# EAGLE board SparkFun_Optical_Tracking_Odometry_Sensor-Panel (EAGLE 9.6.2), part 1 of 6
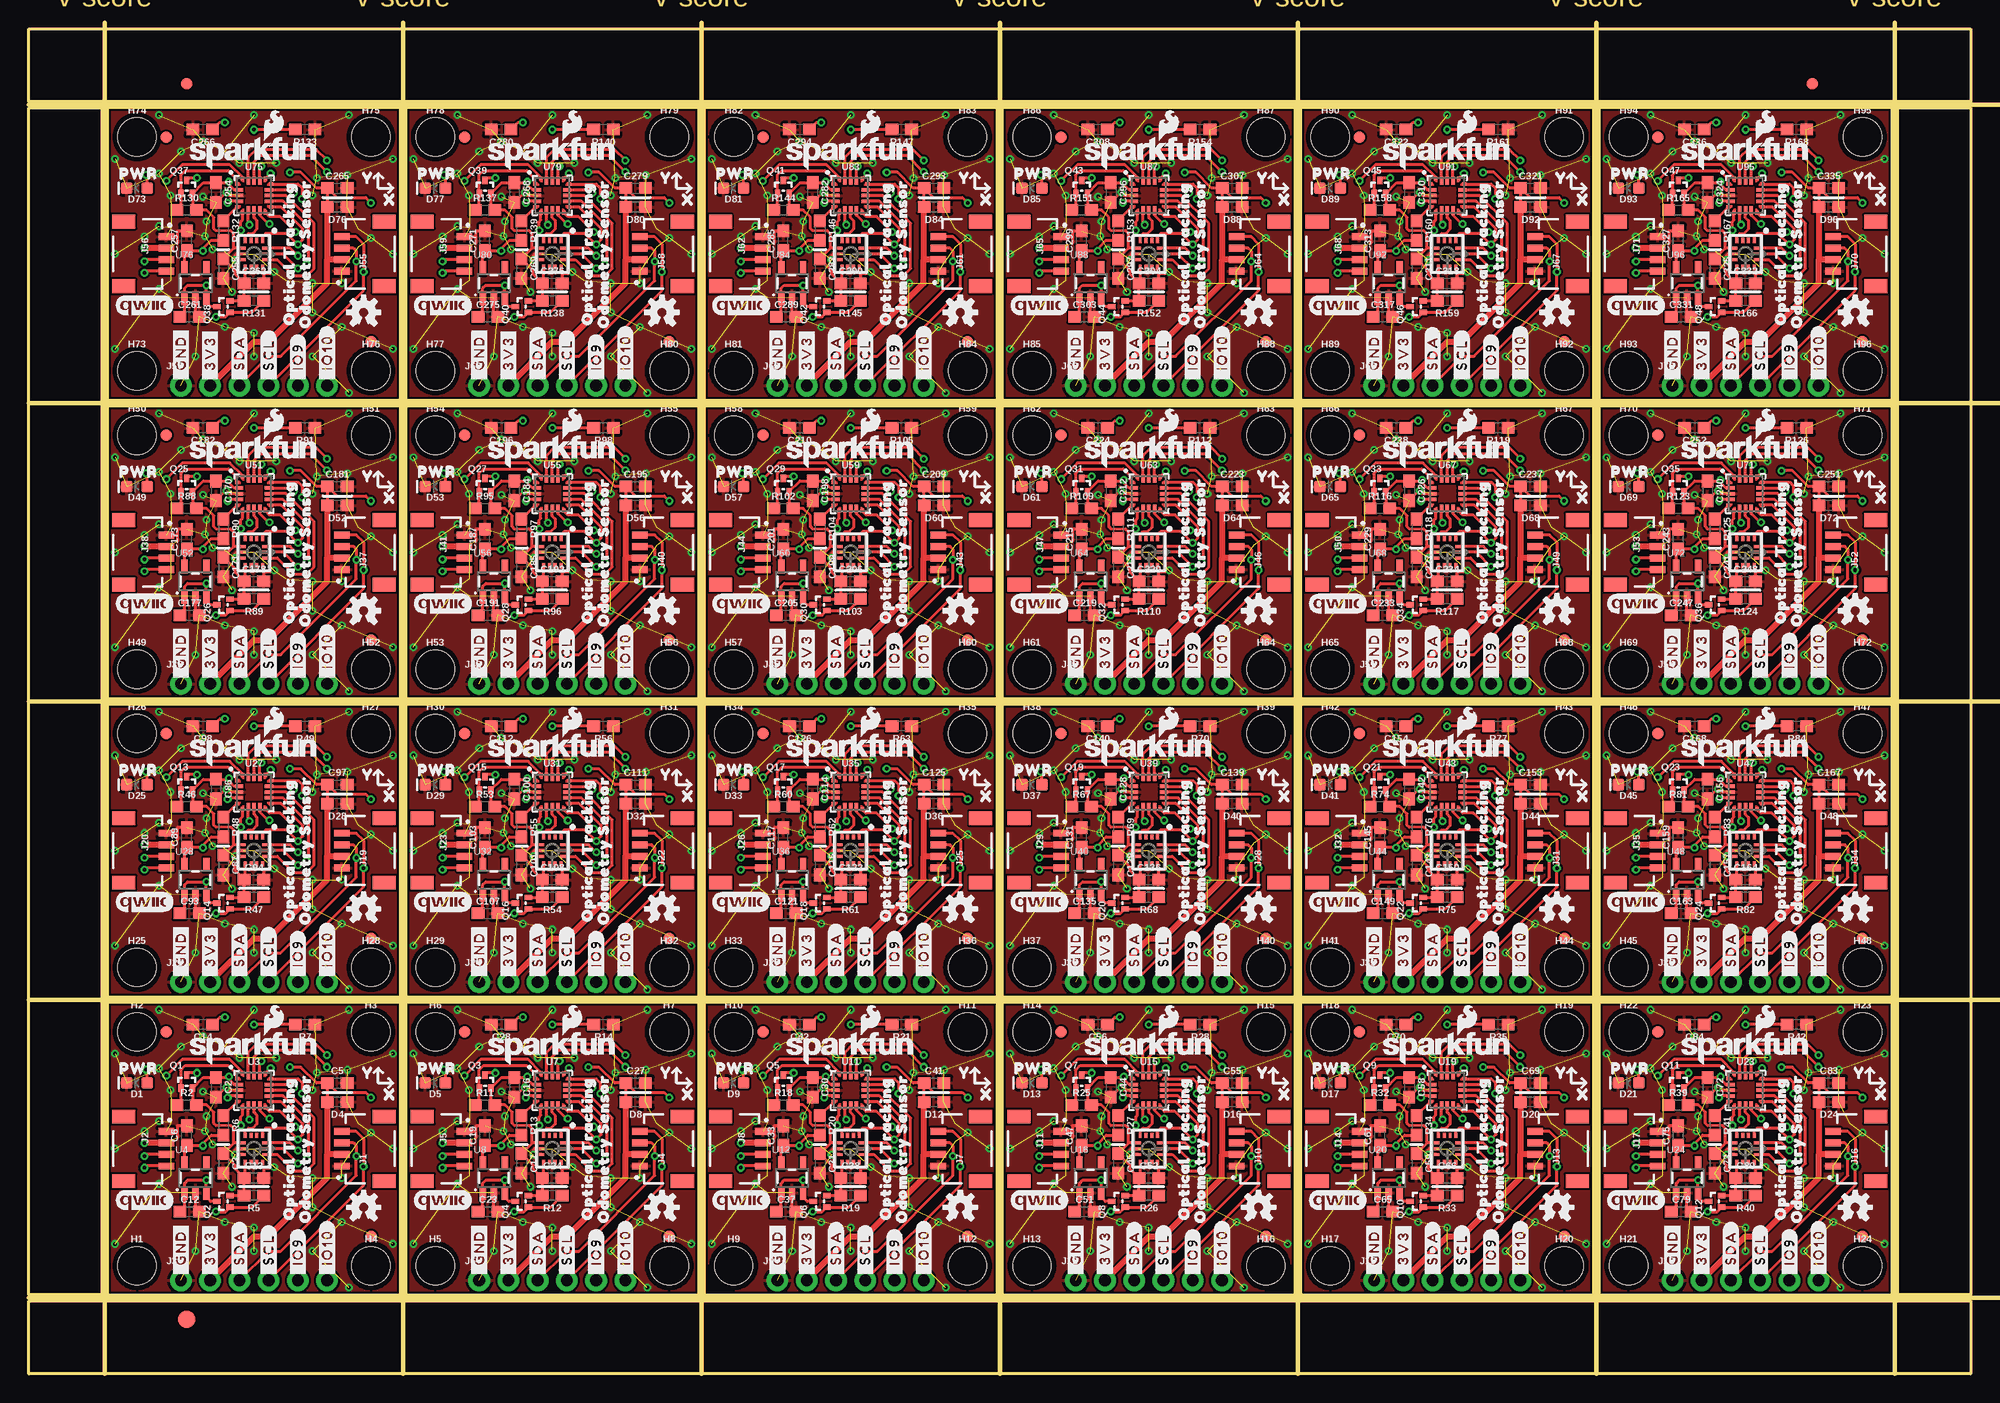
[diagram p0: board, top side]
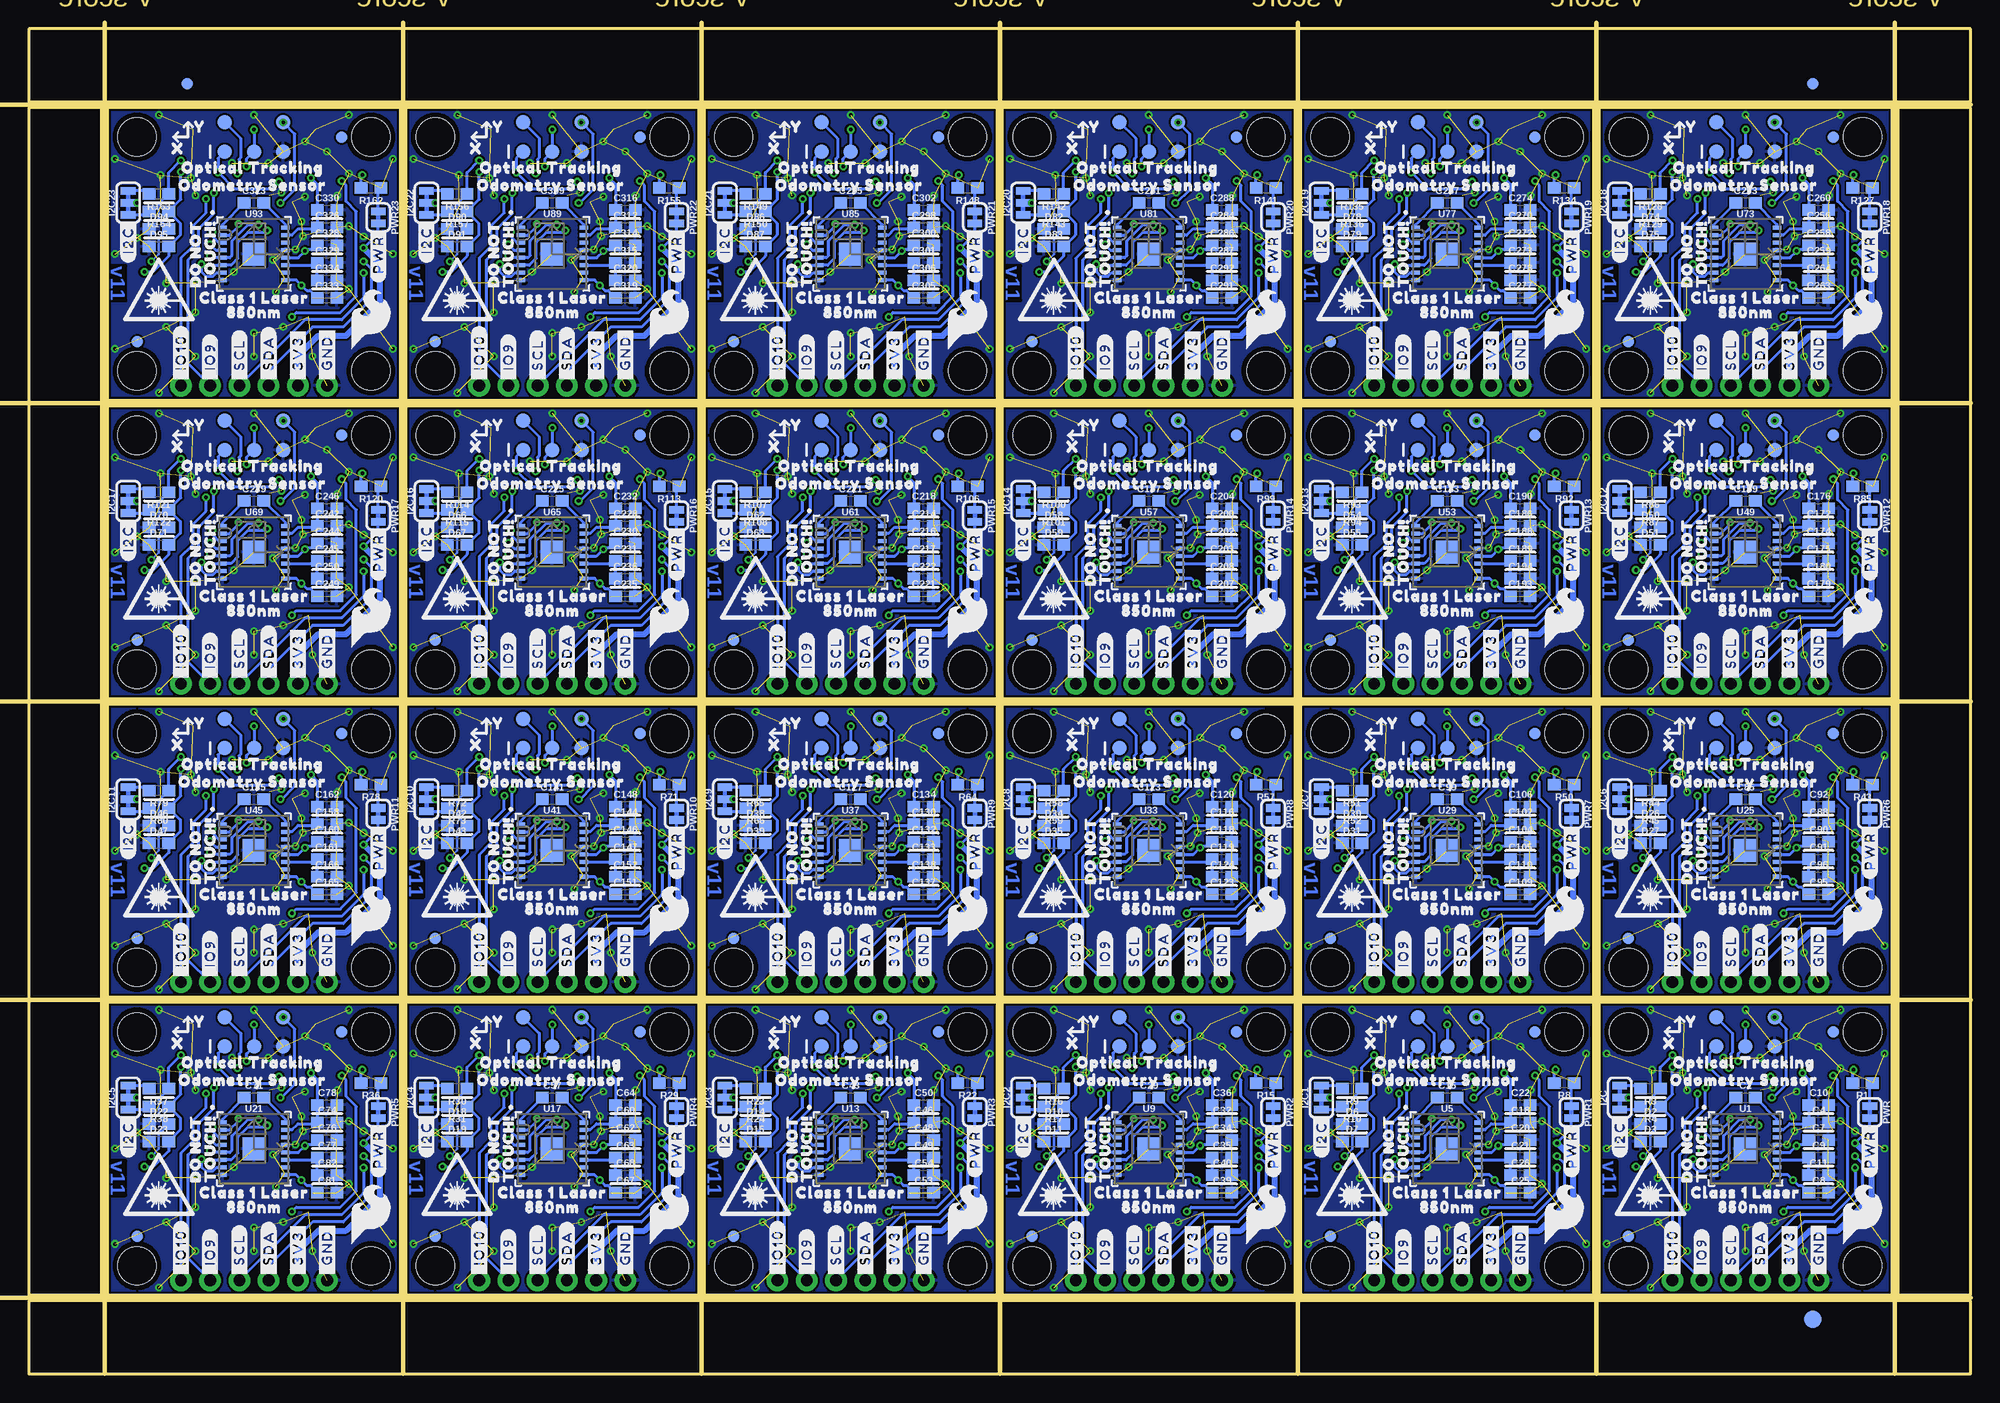
[diagram p1: board, bottom side, seen from below]

Size 168.66 x 116.84 mm. Coordinates in mm from the lower left corner, seen from the top.
Outline: 6.86,6.86 32.26,6.86 32.26,32.26 6.86,32.26 6.86,6.86
Outline: 32.77,6.86 58.17,6.86 58.17,32.26 32.77,32.26 32.77,6.86
Outline: 58.67,6.86 84.07,6.86 84.07,32.26 58.67,32.26 58.67,6.86
Outline: 84.58,6.86 109.98,6.86 109.98,32.26 84.58,32.26 84.58,6.86
Outline: 110.49,6.86 135.89,6.86 135.89,32.26 110.49,32.26 110.49,6.86
Outline: 136.4,6.86 161.8,6.86 161.8,32.26 136.4,32.26 136.4,6.86
Outline: 6.86,32.77 32.26,32.77 32.26,58.17 6.86,58.17 6.86,32.77
Outline: 32.77,32.77 58.17,32.77 58.17,58.17 32.77,58.17 32.77,32.77
Outline: 58.67,32.77 84.07,32.77 84.07,58.17 58.67,58.17 58.67,32.77
Outline: 84.58,32.77 109.98,32.77 109.98,58.17 84.58,58.17 84.58,32.77
Outline: 110.49,32.77 135.89,32.77 135.89,58.17 110.49,58.17 110.49,32.77
Outline: 136.4,32.77 161.8,32.77 161.8,58.17 136.4,58.17 136.4,32.77
Outline: 6.86,58.67 32.26,58.67 32.26,84.07 6.86,84.07 6.86,58.67
Outline: 32.77,58.67 58.17,58.67 58.17,84.07 32.77,84.07 32.77,58.67
Outline: 58.67,58.67 84.07,58.67 84.07,84.07 58.67,84.07 58.67,58.67
Outline: 84.58,58.67 109.98,58.67 109.98,84.07 84.58,84.07 84.58,58.67
Outline: 110.49,58.67 135.89,58.67 135.89,84.07 110.49,84.07 110.49,58.67
Outline: 136.4,58.67 161.8,58.67 161.8,84.07 136.4,84.07 136.4,58.67
Outline: 6.86,84.58 32.26,84.58 32.26,109.98 6.86,109.98 6.86,84.58
Outline: 32.77,84.58 58.17,84.58 58.17,109.98 32.77,109.98 32.77,84.58
Outline: 58.67,84.58 84.07,84.58 84.07,109.98 58.67,109.98 58.67,84.58
Outline: 84.58,84.58 109.98,84.58 109.98,109.98 84.58,109.98 84.58,84.58
Outline: 110.49,84.58 135.89,84.58 135.89,109.98 110.49,109.98 110.49,84.58
Outline: 136.4,84.58 161.8,84.58 161.8,109.98 136.4,109.98 136.4,84.58
Outline: 0,6.35 168.66,6.35 168.66,0 0,0 0,6.35
Outline: 162.31,109.98 168.66,109.98 168.66,6.86 162.31,6.86 162.31,109.98
Outline: 0,116.84 168.66,116.84 168.66,110.49 0,110.49 0,116.84
Outline: 0,109.98 6.35,109.98 6.35,6.86 0,6.86 0,109.98
Copper layers (1*16): Top 0.035mm / dielectric 1.5mm / Bottom 0.035mm
Design rules "SparkFun_Optical_Tracking_Odometry_Sensor": minimum track width 7mil, minimum drill 0.3mm, track to track 7mil, track to pad 7mil, pad to pad 7mil, via to via 7mil, smd to smd 7mil, copper to edge 7mil, drill to drill 7mil, minimum pad ring 7mil, minimum via ring 7mil, stop-mask expansion 3mil, vias tented up to drill 25mil, thermal gap 10mil
tRestrict: area 13.6,23 to 13.8,23.1; area 39.5,23 to 39.8,23.1; area 65.4,23 to 65.7,23.1; area 91.3,23 to 91.6,23.1; area 117.2,23 to 117.5,23.1; area 143.1,23 to 143.4,23.1; area 13.6,48.9 to 13.8,49; area 39.5,48.9 to 39.8,49; area 65.4,48.9 to 65.7,49; area 91.3,48.9 to 91.6,49; area 117.2,48.9 to 117.5,49; area 143.1,48.9 to 143.4,49; area 13.6,74.8 to 13.8,74.9; area 39.5,74.8 to 39.8,74.9; area 65.4,74.8 to 65.7,74.9; area 91.3,74.8 to 91.6,74.9; area 117.2,74.8 to 117.5,74.9; area 143.1,74.8 to 143.4,74.9; area 13.6,100.7 to 13.8,100.8; area 39.5,100.7 to 39.8,100.8; area 65.4,100.7 to 65.7,100.8; area 91.3,100.7 to 91.6,100.8; area 117.2,100.7 to 117.5,100.8; area 143.1,100.7 to 143.4,100.8
Milling: 12 lines

## Footprints (pad centres in the part's own frame; a part is rotated, then mirrored left to right if it is on the bottom)
0603 = smd 1.1 x 1: 1 -0.85,0; 2 0.85,0
LED-0603 = smd 1 x 1: A -0.877,0; C 0.877,0
FIDUCIAL-1X2 = smd 1 x 1: 1 0,0
FIDUCIAL-1.5X3 = smd 1.5 x 1.5: 1 0,0
STAND-OFF = hole 3.302: 0,0
SMT-JUMPER_3_2-NC_TRACE_SILK = smd 0.66 x 1.27: 1 -1.041,0; 2 0,0; 3 1.041,0
JST04_1MM_RA = smd 0.6 x 1.35: 1 -1.5,0; 2 -0.5,0; 3 0.5,0; 4 1.5,0 | smd 1.2 x 2: NC1 2.8,-3.675; NC2 -2.8,-3.675
1X06_NO_SILK = drill 1.016 pad 1.88: 1 0,0; 2 2.54,0; 3 5.08,0; 4 7.62,0; 5 10.16,0; 6 12.7,0
SMT-JUMPER_2_NC_TRACE_SILK = smd 0.66 x 1.27: 1 -0.521,0; 2 0.521,0
SOT-416FL = smd 0.46 x 0.65: 1 -0.5,-1.1; 2 0.5,-1.1; 3 0,0.05
PAA5160E1-Q = smd 0.73 x 0.35: 1 -2.735,2.275; 2 -2.735,1.625; 3 -2.735,0.975; 4 -2.735,0.325; 5 -2.735,-0.325; 6 -2.735,-0.975; 7 -2.735,-1.625; 8 -2.735,-2.275; 9 2.735,-2.275; 10 2.735,-1.625; 11 2.735,-0.975; 12 2.735,-0.325; 13 2.735,0.325; 14 2.735,0.975; 15 2.735,1.625; 16 2.735,2.275 | smd 2 x 2: 17 0,0
LGA14L = smd 0.45 x 0.25: 1 -1.175,0.75; 2 -1.175,0.25; 3 -1.175,-0.25; 4 -1.175,-0.75; 8 1.175,-0.75; 9 1.175,-0.25; 10 1.175,0.25; 11 1.175,0.75 | smd 0.25 x 0.45: 5 -0.5,-0.925; 6 0,-0.925; 7 0.5,-0.925; 12 0.5,0.925; 13 0,0.925; 14 -0.5,0.925
STM32C011F6U6 = smd 0.3 x 0.3: 1 -1.5,1; 5 -1.5,-1; 6 -1,-1.5; 10 1,-1.5; 11 1.5,-1; 15 1.5,1; 16 1,1.5; 20 -1,1.5 | smd 0.7 x 0.3: 2 -1.3,0.5; 3 -1.3,0; 4 -1.3,-0.5; 12 1.3,-0.5; 13 1.3,0; 14 1.3,0.5 | smd 0.3 x 0.7: 7 -0.5,-1.3; 8 0,-1.3; 9 0.5,-1.3; 17 0.5,1.3; 18 0,1.3; 19 -0.5,1.3
SOT23-5 = smd 0.55 x 1.2: 1 -0.95,-1.3; 2 0,-1.3; 3 0.95,-1.3; 4 0.95,1.3; 5 -0.95,1.3
PAD_05_03X2_TP_NO4 = smd 1.27 x 1.27: 1 -2.54,-1.27; 2 -2.54,1.27; 3 0,-1.27; 5 2.54,-1.27; 6 2.54,1.27

## Placement (x,y rotation side)
C1  470pF  [0603]  19.56,24 0 bottom
C2  0.1uF  [0603]  16.26,24.89 270 top
C3  0.1uF  [0603]  16.89,18.29 270 top
C4  0.1uF  [0603]  13.21,21.84 0 bottom
C5  22uF  [0603]  26.8,25.27 0 top
C6  22uF  [0603]  13.72,20.7 90 top
C7  0.1uF  [0603]  13.21,20.32 0 bottom
C8  0.1uF  [0603]  13.21,15.75 0 bottom
C9  0.1uF  [0603]  13.21,18.8 0 bottom
C10  4.7uF  [0603]  13.21,23.37 0 bottom
C11  4.7uF  [0603]  13.21,17.27 0 bottom
C12  22uF  [0603]  13.97,14.1 0 top
C13  0.1uF  [0603]  19.56,17.02 0 top
C14  0.1uF  [0603]  15.11,30.35 180 top
C15  470pF  [0603]  45.47,24 0 bottom
C16  0.1uF  [0603]  42.16,24.89 270 top
C17  0.1uF  [0603]  42.8,18.29 270 top
C18  0.1uF  [0603]  39.12,21.84 0 bottom
C19  22uF  [0603]  39.62,20.7 90 top
C20  0.1uF  [0603]  39.12,20.32 0 bottom
C21  0.1uF  [0603]  39.12,18.8 0 bottom
C22  4.7uF  [0603]  39.12,23.37 0 bottom
C23  22uF  [0603]  39.88,14.1 0 top
C24  0.1uF  [0603]  45.47,17.02 0 top
C25  0.1uF  [0603]  39.12,15.75 0 bottom
C26  4.7uF  [0603]  39.12,17.27 0 bottom
C27  22uF  [0603]  52.7,25.27 0 top
C28  0.1uF  [0603]  41.02,30.35 180 top
C29  470pF  [0603]  71.37,24 0 bottom
C30  0.1uF  [0603]  68.07,24.89 270 top
C31  0.1uF  [0603]  68.71,18.29 270 top
C32  0.1uF  [0603]  65.02,21.84 0 bottom
C33  22uF  [0603]  65.53,20.7 90 top
C34  0.1uF  [0603]  65.02,20.32 0 bottom
C35  0.1uF  [0603]  65.02,18.8 0 bottom
C36  4.7uF  [0603]  65.02,23.37 0 bottom
C37  22uF  [0603]  65.79,14.1 0 top
C38  0.1uF  [0603]  71.37,17.02 0 top
C39  0.1uF  [0603]  65.02,15.75 0 bottom
C40  4.7uF  [0603]  65.02,17.27 0 bottom
C41  22uF  [0603]  78.61,25.27 0 top
C42  0.1uF  [0603]  66.93,30.35 180 top
C43  470pF  [0603]  97.28,24 0 bottom
C44  0.1uF  [0603]  93.98,24.89 270 top
C45  0.1uF  [0603]  94.62,18.29 270 top
C46  0.1uF  [0603]  90.93,21.84 0 bottom
C47  22uF  [0603]  91.44,20.7 90 top
C48  0.1uF  [0603]  90.93,20.32 0 bottom
C49  0.1uF  [0603]  90.93,18.8 0 bottom
C50  4.7uF  [0603]  90.93,23.37 0 bottom
C51  22uF  [0603]  91.69,14.1 0 top
C52  0.1uF  [0603]  97.28,17.02 0 top
C53  0.1uF  [0603]  90.93,15.75 0 bottom
C54  4.7uF  [0603]  90.93,17.27 0 bottom
C55  22uF  [0603]  104.52,25.27 0 top
C56  0.1uF  [0603]  92.84,30.35 180 top
C57  470pF  [0603]  123.19,24 0 bottom
C58  0.1uF  [0603]  119.89,24.89 270 top
C59  0.1uF  [0603]  120.52,18.29 270 top
C60  0.1uF  [0603]  116.84,21.84 0 bottom
C61  22uF  [0603]  117.35,20.7 90 top
C62  0.1uF  [0603]  116.84,20.32 0 bottom
C63  0.1uF  [0603]  116.84,18.8 0 bottom
C64  4.7uF  [0603]  116.84,23.37 0 bottom
C65  22uF  [0603]  117.6,14.1 0 top
C66  0.1uF  [0603]  123.19,17.02 0 top
C67  0.1uF  [0603]  116.84,15.75 0 bottom
C68  4.7uF  [0603]  116.84,17.27 0 bottom
C69  22uF  [0603]  130.43,25.27 0 top
C70  0.1uF  [0603]  118.75,30.35 180 top
C71  470pF  [0603]  149.1,24 0 bottom
C72  0.1uF  [0603]  145.8,24.89 270 top
C73  0.1uF  [0603]  146.43,18.29 270 top
C74  0.1uF  [0603]  142.75,21.84 0 bottom
C75  22uF  [0603]  143.26,20.7 90 top
C76  0.1uF  [0603]  142.75,20.32 0 bottom
C77  0.1uF  [0603]  142.75,18.8 0 bottom
C78  4.7uF  [0603]  142.75,23.37 0 bottom
C79  22uF  [0603]  143.51,14.1 0 top
C80  0.1uF  [0603]  149.1,17.02 0 top
C81  0.1uF  [0603]  142.75,15.75 0 bottom
C82  4.7uF  [0603]  142.75,17.27 0 bottom
C83  22uF  [0603]  156.34,25.27 0 top
C84  0.1uF  [0603]  144.65,30.35 180 top
C85  470pF  [0603]  19.56,49.91 0 bottom
C86  0.1uF  [0603]  16.26,50.8 270 top
C87  0.1uF  [0603]  16.89,44.2 270 top
C88  0.1uF  [0603]  13.21,47.75 0 bottom
C89  22uF  [0603]  13.72,46.61 90 top
C90  0.1uF  [0603]  13.21,46.23 0 bottom
C91  0.1uF  [0603]  13.21,44.7 0 bottom
C92  4.7uF  [0603]  13.21,49.28 0 bottom
C93  22uF  [0603]  13.97,40 0 top
C94  0.1uF  [0603]  19.56,42.93 0 top
C95  0.1uF  [0603]  13.21,41.66 0 bottom
C96  4.7uF  [0603]  13.21,43.18 0 bottom
C97  22uF  [0603]  26.8,51.18 0 top
C98  0.1uF  [0603]  15.11,56.26 180 top
C99  470pF  [0603]  45.47,49.91 0 bottom
C100  0.1uF  [0603]  42.16,50.8 270 top
C101  0.1uF  [0603]  42.8,44.2 270 top
C102  0.1uF  [0603]  39.12,47.75 0 bottom
C103  22uF  [0603]  39.62,46.61 90 top
C104  0.1uF  [0603]  39.12,46.23 0 bottom
C105  0.1uF  [0603]  39.12,44.7 0 bottom
C106  4.7uF  [0603]  39.12,49.28 0 bottom
C107  22uF  [0603]  39.88,40 0 top
C108  0.1uF  [0603]  45.47,42.93 0 top
C109  0.1uF  [0603]  39.12,41.66 0 bottom
C110  4.7uF  [0603]  39.12,43.18 0 bottom
C111  22uF  [0603]  52.7,51.18 0 top
C112  0.1uF  [0603]  41.02,56.26 180 top
C113  470pF  [0603]  71.37,49.91 0 bottom
C114  0.1uF  [0603]  68.07,50.8 270 top
C115  0.1uF  [0603]  68.71,44.2 270 top
C116  0.1uF  [0603]  65.02,47.75 0 bottom
C117  22uF  [0603]  65.53,46.61 90 top
C118  0.1uF  [0603]  65.02,46.23 0 bottom
C119  0.1uF  [0603]  65.02,44.7 0 bottom
C120  4.7uF  [0603]  65.02,49.28 0 bottom
C121  22uF  [0603]  65.79,40 0 top
C122  0.1uF  [0603]  71.37,42.93 0 top
C123  0.1uF  [0603]  65.02,41.66 0 bottom
C124  4.7uF  [0603]  65.02,43.18 0 bottom
C125  22uF  [0603]  78.61,51.18 0 top
C126  0.1uF  [0603]  66.93,56.26 180 top
C127  470pF  [0603]  97.28,49.91 0 bottom
C128  0.1uF  [0603]  93.98,50.8 270 top
C129  0.1uF  [0603]  94.62,44.2 270 top
C130  0.1uF  [0603]  90.93,47.75 0 bottom
C131  22uF  [0603]  91.44,46.61 90 top
C132  0.1uF  [0603]  90.93,46.23 0 bottom
C133  0.1uF  [0603]  90.93,44.7 0 bottom
C134  4.7uF  [0603]  90.93,49.28 0 bottom
C135  22uF  [0603]  91.69,40 0 top
C136  0.1uF  [0603]  97.28,42.93 0 top
C137  0.1uF  [0603]  90.93,41.66 0 bottom
C138  4.7uF  [0603]  90.93,43.18 0 bottom
C139  22uF  [0603]  104.52,51.18 0 top
C140  0.1uF  [0603]  92.84,56.26 180 top
C141  470pF  [0603]  123.19,49.91 0 bottom
C142  0.1uF  [0603]  119.89,50.8 270 top
C143  0.1uF  [0603]  120.52,44.2 270 top
C144  0.1uF  [0603]  116.84,47.75 0 bottom
C145  22uF  [0603]  117.35,46.61 90 top
C146  0.1uF  [0603]  116.84,46.23 0 bottom
C147  0.1uF  [0603]  116.84,44.7 0 bottom
C148  4.7uF  [0603]  116.84,49.28 0 bottom
C149  22uF  [0603]  117.6,40 0 top
C150  0.1uF  [0603]  123.19,42.93 0 top
C151  0.1uF  [0603]  116.84,41.66 0 bottom
C152  4.7uF  [0603]  116.84,43.18 0 bottom
C153  22uF  [0603]  130.43,51.18 0 top
C154  0.1uF  [0603]  118.75,56.26 180 top
C155  470pF  [0603]  149.1,49.91 0 bottom
C156  0.1uF  [0603]  145.8,50.8 270 top
C157  0.1uF  [0603]  146.43,44.2 270 top
C158  0.1uF  [0603]  142.75,47.75 0 bottom
C159  22uF  [0603]  143.26,46.61 90 top
C160  0.1uF  [0603]  142.75,46.23 0 bottom
C161  0.1uF  [0603]  142.75,44.7 0 bottom
C162  4.7uF  [0603]  142.75,49.28 0 bottom
C163  22uF  [0603]  143.51,40 0 top
C164  0.1uF  [0603]  149.1,42.93 0 top
C165  0.1uF  [0603]  142.75,41.66 0 bottom
C166  4.7uF  [0603]  142.75,43.18 0 bottom
C167  22uF  [0603]  156.34,51.18 0 top
C168  0.1uF  [0603]  144.65,56.26 180 top
C169  470pF  [0603]  19.56,75.82 0 bottom
C170  0.1uF  [0603]  16.26,76.71 270 top
C171  0.1uF  [0603]  16.89,70.1 270 top
C172  0.1uF  [0603]  13.21,73.66 0 bottom
C173  22uF  [0603]  13.72,72.52 90 top
C174  0.1uF  [0603]  13.21,72.14 0 bottom
C175  0.1uF  [0603]  13.21,70.61 0 bottom
C176  4.7uF  [0603]  13.21,75.18 0 bottom
C177  22uF  [0603]  13.97,65.91 0 top
C178  0.1uF  [0603]  19.56,68.83 0 top
C179  0.1uF  [0603]  13.21,67.56 0 bottom
C180  4.7uF  [0603]  13.21,69.09 0 bottom
C181  22uF  [0603]  26.8,77.09 0 top
C182  0.1uF  [0603]  15.11,82.17 180 top
C183  470pF  [0603]  45.47,75.82 0 bottom
C184  0.1uF  [0603]  42.16,76.71 270 top
C185  0.1uF  [0603]  42.8,70.1 270 top
C186  0.1uF  [0603]  39.12,73.66 0 bottom
C187  22uF  [0603]  39.62,72.52 90 top
C188  0.1uF  [0603]  39.12,72.14 0 bottom
C189  0.1uF  [0603]  39.12,70.61 0 bottom
C190  4.7uF  [0603]  39.12,75.18 0 bottom
C191  22uF  [0603]  39.88,65.91 0 top
C192  0.1uF  [0603]  45.47,68.83 0 top
C193  0.1uF  [0603]  39.12,67.56 0 bottom
C194  4.7uF  [0603]  39.12,69.09 0 bottom
C195  22uF  [0603]  52.7,77.09 0 top
C196  0.1uF  [0603]  41.02,82.17 180 top
C197  470pF  [0603]  71.37,75.82 0 bottom
C198  0.1uF  [0603]  68.07,76.71 270 top
C199  0.1uF  [0603]  68.71,70.1 270 top
C200  0.1uF  [0603]  65.02,73.66 0 bottom
C201  22uF  [0603]  65.53,72.52 90 top
C202  0.1uF  [0603]  65.02,72.14 0 bottom
C203  0.1uF  [0603]  65.02,70.61 0 bottom
C204  4.7uF  [0603]  65.02,75.18 0 bottom
C205  22uF  [0603]  65.79,65.91 0 top
C206  0.1uF  [0603]  71.37,68.83 0 top
C207  0.1uF  [0603]  65.02,67.56 0 bottom
C208  4.7uF  [0603]  65.02,69.09 0 bottom
C209  22uF  [0603]  78.61,77.09 0 top
C210  0.1uF  [0603]  66.93,82.17 180 top
C211  470pF  [0603]  97.28,75.82 0 bottom
C212  0.1uF  [0603]  93.98,76.71 270 top
C213  0.1uF  [0603]  94.62,70.1 270 top
C214  0.1uF  [0603]  90.93,73.66 0 bottom
C215  22uF  [0603]  91.44,72.52 90 top
C216  0.1uF  [0603]  90.93,72.14 0 bottom
C217  0.1uF  [0603]  90.93,70.61 0 bottom
C218  4.7uF  [0603]  90.93,75.18 0 bottom
C219  22uF  [0603]  91.69,65.91 0 top
C220  0.1uF  [0603]  97.28,68.83 0 top
C221  0.1uF  [0603]  90.93,67.56 0 bottom
C222  4.7uF  [0603]  90.93,69.09 0 bottom
C223  22uF  [0603]  104.52,77.09 0 top
C224  0.1uF  [0603]  92.84,82.17 180 top
C225  470pF  [0603]  123.19,75.82 0 bottom
C226  0.1uF  [0603]  119.89,76.71 270 top
C227  0.1uF  [0603]  120.52,70.1 270 top
C228  0.1uF  [0603]  116.84,73.66 0 bottom
C229  22uF  [0603]  117.35,72.52 90 top
C230  0.1uF  [0603]  116.84,72.14 0 bottom
C231  0.1uF  [0603]  116.84,70.61 0 bottom
C232  4.7uF  [0603]  116.84,75.18 0 bottom
C233  22uF  [0603]  117.6,65.91 0 top
C234  0.1uF  [0603]  123.19,68.83 0 top
C235  0.1uF  [0603]  116.84,67.56 0 bottom
C236  4.7uF  [0603]  116.84,69.09 0 bottom
C237  22uF  [0603]  130.43,77.09 0 top
C238  0.1uF  [0603]  118.75,82.17 180 top
C239  470pF  [0603]  149.1,75.82 0 bottom
C240  0.1uF  [0603]  145.8,76.71 270 top
C241  0.1uF  [0603]  146.43,70.1 270 top
C242  0.1uF  [0603]  142.75,73.66 0 bottom
C243  22uF  [0603]  143.26,72.52 90 top
C244  0.1uF  [0603]  142.75,72.14 0 bottom
C245  0.1uF  [0603]  142.75,70.61 0 bottom
C246  4.7uF  [0603]  142.75,75.18 0 bottom
C247  22uF  [0603]  143.51,65.91 0 top
C248  0.1uF  [0603]  149.1,68.83 0 top
C249  0.1uF  [0603]  142.75,67.56 0 bottom
C250  4.7uF  [0603]  142.75,69.09 0 bottom
C251  22uF  [0603]  156.34,77.09 0 top
C252  0.1uF  [0603]  144.65,82.17 180 top
C253  470pF  [0603]  19.56,101.73 0 bottom
C254  0.1uF  [0603]  16.26,102.62 270 top
C255  0.1uF  [0603]  16.89,96.01 270 top
C256  0.1uF  [0603]  13.21,99.57 0 bottom
C257  22uF  [0603]  13.72,98.42 90 top
C258  0.1uF  [0603]  13.21,98.04 0 bottom
C259  0.1uF  [0603]  13.21,96.52 0 bottom
C260  4.7uF  [0603]  13.21,101.09 0 bottom
C261  22uF  [0603]  13.97,91.82 0 top
C262  0.1uF  [0603]  19.56,94.74 0 top
C263  0.1uF  [0603]  13.21,93.47 0 bottom
C264  4.7uF  [0603]  13.21,95 0 bottom
C265  22uF  [0603]  26.8,103 0 top
C266  0.1uF  [0603]  15.11,108.08 180 top
C267  470pF  [0603]  45.47,101.73 0 bottom
C268  0.1uF  [0603]  42.16,102.62 270 top
C269  0.1uF  [0603]  42.8,96.01 270 top
C270  0.1uF  [0603]  39.12,99.57 0 bottom
C271  22uF  [0603]  39.62,98.42 90 top
C272  0.1uF  [0603]  39.12,98.04 0 bottom
C273  0.1uF  [0603]  39.12,96.52 0 bottom
C274  4.7uF  [0603]  39.12,101.09 0 bottom
C275  22uF  [0603]  39.88,91.82 0 top
C276  0.1uF  [0603]  45.47,94.74 0 top
C277  0.1uF  [0603]  39.12,93.47 0 bottom
C278  4.7uF  [0603]  39.12,95 0 bottom
C279  22uF  [0603]  52.7,103 0 top
C280  0.1uF  [0603]  41.02,108.08 180 top
C281  470pF  [0603]  71.37,101.73 0 bottom
C282  0.1uF  [0603]  68.07,102.62 270 top
C283  0.1uF  [0603]  68.71,96.01 270 top
C284  0.1uF  [0603]  65.02,99.57 0 bottom
C285  22uF  [0603]  65.53,98.42 90 top
C286  0.1uF  [0603]  65.02,98.04 0 bottom
C287  0.1uF  [0603]  65.02,96.52 0 bottom
C288  4.7uF  [0603]  65.02,101.09 0 bottom
C289  22uF  [0603]  65.79,91.82 0 top
C290  0.1uF  [0603]  71.37,94.74 0 top
C291  0.1uF  [0603]  65.02,93.47 0 bottom
C292  4.7uF  [0603]  65.02,95 0 bottom
C293  22uF  [0603]  78.61,103 0 top
C294  0.1uF  [0603]  66.93,108.08 180 top
C295  470pF  [0603]  97.28,101.73 0 bottom
C296  0.1uF  [0603]  93.98,102.62 270 top
C297  0.1uF  [0603]  94.62,96.01 270 top
C298  0.1uF  [0603]  90.93,99.57 0 bottom
C299  22uF  [0603]  91.44,98.42 90 top
C300  0.1uF  [0603]  90.93,98.04 0 bottom
C301  0.1uF  [0603]  90.93,96.52 0 bottom
C302  4.7uF  [0603]  90.93,101.09 0 bottom
C303  22uF  [0603]  91.69,91.82 0 top
C304  0.1uF  [0603]  97.28,94.74 0 top
C305  0.1uF  [0603]  90.93,93.47 0 bottom
C306  4.7uF  [0603]  90.93,95 0 bottom
C307  22uF  [0603]  104.52,103 0 top
C308  0.1uF  [0603]  92.84,108.08 180 top
C309  470pF  [0603]  123.19,101.73 0 bottom
C310  0.1uF  [0603]  119.89,102.62 270 top
C311  0.1uF  [0603]  120.52,96.01 270 top
C312  0.1uF  [0603]  116.84,99.57 0 bottom
C313  22uF  [0603]  117.35,98.42 90 top
C314  0.1uF  [0603]  116.84,98.04 0 bottom
C315  0.1uF  [0603]  116.84,96.52 0 bottom
C316  4.7uF  [0603]  116.84,101.09 0 bottom
C317  22uF  [0603]  117.6,91.82 0 top
C318  0.1uF  [0603]  123.19,94.74 0 top
C319  0.1uF  [0603]  116.84,93.47 0 bottom
C320  4.7uF  [0603]  116.84,95 0 bottom
C321  22uF  [0603]  130.43,103 0 top
C322  0.1uF  [0603]  118.75,108.08 180 top
C323  470pF  [0603]  149.1,101.73 0 bottom
C324  0.1uF  [0603]  145.8,102.62 270 top
C325  0.1uF  [0603]  146.43,96.01 270 top
C326  0.1uF  [0603]  142.75,99.57 0 bottom
C327  22uF  [0603]  143.26,98.42 90 top
C328  0.1uF  [0603]  142.75,98.04 0 bottom
C329  0.1uF  [0603]  142.75,96.52 0 bottom
C330  4.7uF  [0603]  142.75,101.09 0 bottom
C331  22uF  [0603]  143.51,91.82 0 top
C332  0.1uF  [0603]  149.1,94.74 0 top
C333  0.1uF  [0603]  142.75,93.47 0 bottom
C334  4.7uF  [0603]  142.75,95 0 bottom
C335  22uF  [0603]  156.34,103 0 top
C336  0.1uF  [0603]  144.65,108.08 180 top
D1  Red  [LED-0603]  9.4,25.27 180 top
D2  24V  [0603]  27.81,21.72 0 bottom
D3  24V  [0603]  27.81,20.19 0 bottom
D4  24V  [0603]  26.8,23.62 180 top
D5  Red  [LED-0603]  35.31,25.27 180 top
D6  24V  [0603]  53.72,21.72 0 bottom
D7  24V  [0603]  53.72,20.19 0 bottom
D8  24V  [0603]  52.7,23.62 180 top
D9  Red  [LED-0603]  61.21,25.27 180 top
D10  24V  [0603]  79.63,21.72 0 bottom
D11  24V  [0603]  79.63,20.19 0 bottom
D12  24V  [0603]  78.61,23.62 180 top
D13  Red  [LED-0603]  87.12,25.27 180 top
D14  24V  [0603]  105.54,21.72 0 bottom
D15  24V  [0603]  105.54,20.19 0 bottom
D16  24V  [0603]  104.52,23.62 180 top
D17  Red  [LED-0603]  113.03,25.27 180 top
D18  24V  [0603]  131.44,21.72 0 bottom
D19  24V  [0603]  131.44,20.19 0 bottom
D20  24V  [0603]  130.43,23.62 180 top
D21  Red  [LED-0603]  138.94,25.27 180 top
D22  24V  [0603]  157.35,21.72 0 bottom
D23  24V  [0603]  157.35,20.19 0 bottom
D24  24V  [0603]  156.34,23.62 180 top
D25  Red  [LED-0603]  9.4,51.18 180 top
D26  24V  [0603]  27.81,47.62 0 bottom
D27  24V  [0603]  27.81,46.1 0 bottom
D28  24V  [0603]  26.8,49.53 180 top
D29  Red  [LED-0603]  35.31,51.18 180 top
D30  24V  [0603]  53.72,47.62 0 bottom
D31  24V  [0603]  53.72,46.1 0 bottom
D32  24V  [0603]  52.7,49.53 180 top
D33  Red  [LED-0603]  61.21,51.18 180 top
D34  24V  [0603]  79.63,47.62 0 bottom
D35  24V  [0603]  79.63,46.1 0 bottom
D36  24V  [0603]  78.61,49.53 180 top
D37  Red  [LED-0603]  87.12,51.18 180 top
D38  24V  [0603]  105.54,47.62 0 bottom
D39  24V  [0603]  105.54,46.1 0 bottom
D40  24V  [0603]  104.52,49.53 180 top
D41  Red  [LED-0603]  113.03,51.18 180 top
D42  24V  [0603]  131.44,47.62 0 bottom
D43  24V  [0603]  131.44,46.1 0 bottom
D44  24V  [0603]  130.43,49.53 180 top
D45  Red  [LED-0603]  138.94,51.18 180 top
D46  24V  [0603]  157.35,47.62 0 bottom
D47  24V  [0603]  157.35,46.1 0 bottom
D48  24V  [0603]  156.34,49.53 180 top
D49  Red  [LED-0603]  9.4,77.09 180 top
D50  24V  [0603]  27.81,73.53 0 bottom
D51  24V  [0603]  27.81,72.01 0 bottom
D52  24V  [0603]  26.8,75.44 180 top
D53  Red  [LED-0603]  35.31,77.09 180 top
D54  24V  [0603]  53.72,73.53 0 bottom
D55  24V  [0603]  53.72,72.01 0 bottom
D56  24V  [0603]  52.7,75.44 180 top
D57  Red  [LED-0603]  61.21,77.09 180 top
D58  24V  [0603]  79.63,73.53 0 bottom
D59  24V  [0603]  79.63,72.01 0 bottom
D60  24V  [0603]  78.61,75.44 180 top
D61  Red  [LED-0603]  87.12,77.09 180 top
D62  24V  [0603]  105.54,73.53 0 bottom
D63  24V  [0603]  105.54,72.01 0 bottom
D64  24V  [0603]  104.52,75.44 180 top
D65  Red  [LED-0603]  113.03,77.09 180 top
D66  24V  [0603]  131.44,73.53 0 bottom
D67  24V  [0603]  131.44,72.01 0 bottom
D68  24V  [0603]  130.43,75.44 180 top
D69  Red  [LED-0603]  138.94,77.09 180 top
D70  24V  [0603]  157.35,73.53 0 bottom
D71  24V  [0603]  157.35,72.01 0 bottom
D72  24V  [0603]  156.34,75.44 180 top
D73  Red  [LED-0603]  9.4,103 180 top
D74  24V  [0603]  27.81,99.44 0 bottom
D75  24V  [0603]  27.81,97.92 0 bottom
D76  24V  [0603]  26.8,101.35 180 top
D77  Red  [LED-0603]  35.31,103 180 top
D78  24V  [0603]  53.72,99.44 0 bottom
D79  24V  [0603]  53.72,97.92 0 bottom
D80  24V  [0603]  52.7,101.35 180 top
D81  Red  [LED-0603]  61.21,103 180 top
D82  24V  [0603]  79.63,99.44 0 bottom
D83  24V  [0603]  79.63,97.92 0 bottom
D84  24V  [0603]  78.61,101.35 180 top
D85  Red  [LED-0603]  87.12,103 180 top
D86  24V  [0603]  105.54,99.44 0 bottom
D87  24V  [0603]  105.54,97.92 0 bottom
D88  24V  [0603]  104.52,101.35 180 top
D89  Red  [LED-0603]  113.03,103 180 top
D90  24V  [0603]  131.44,99.44 0 bottom
D91  24V  [0603]  131.44,97.92 0 bottom
D92  24V  [0603]  130.43,101.35 180 top
D93  Red  [LED-0603]  138.94,103 180 top
D94  24V  [0603]  157.35,99.44 0 bottom
D95  24V  [0603]  157.35,97.92 0 bottom
D96  24V  [0603]  156.34,101.35 180 top
E$1  [FIDUCIAL-1X2]  13.72,112.08 0 top
E$2  [FIDUCIAL-1X2]  13.72,112.08 0 bottom
E$3  [FIDUCIAL-1X2]  154.88,112.08 0 top
E$4  [FIDUCIAL-1X2]  154.88,112.08 0 bottom
E$5  [FIDUCIAL-1.5X3]  13.72,4.76 0 top
E$6  [FIDUCIAL-1.5X3]  13.72,4.76 0 bottom
FD1  FIDUCIAL1X2  [FIDUCIAL-1X2]  11.94,29.72 0 bottom
FD2  FIDUCIAL1X2  [FIDUCIAL-1X2]  11.94,29.72 0 top
FD3  FIDUCIAL1X2  [FIDUCIAL-1X2]  29.72,11.94 0 bottom
FD4  FIDUCIAL1X2  [FIDUCIAL-1X2]  29.72,11.94 0 top
FD5  FIDUCIAL1X2  [FIDUCIAL-1X2]  37.85,29.72 0 bottom
FD6  FIDUCIAL1X2  [FIDUCIAL-1X2]  37.85,29.72 0 top
FD7  FIDUCIAL1X2  [FIDUCIAL-1X2]  55.63,11.94 0 bottom
FD8  FIDUCIAL1X2  [FIDUCIAL-1X2]  55.63,11.94 0 top
FD9  FIDUCIAL1X2  [FIDUCIAL-1X2]  63.75,29.72 0 bottom
FD10  FIDUCIAL1X2  [FIDUCIAL-1X2]  63.75,29.72 0 top
FD11  FIDUCIAL1X2  [FIDUCIAL-1X2]  81.53,11.94 0 bottom
FD12  FIDUCIAL1X2  [FIDUCIAL-1X2]  81.53,11.94 0 top
FD13  FIDUCIAL1X2  [FIDUCIAL-1X2]  89.66,29.72 0 bottom
FD14  FIDUCIAL1X2  [FIDUCIAL-1X2]  89.66,29.72 0 top
FD15  FIDUCIAL1X2  [FIDUCIAL-1X2]  107.44,11.94 0 bottom
FD16  FIDUCIAL1X2  [FIDUCIAL-1X2]  107.44,11.94 0 top
FD17  FIDUCIAL1X2  [FIDUCIAL-1X2]  115.57,29.72 0 bottom
FD18  FIDUCIAL1X2  [FIDUCIAL-1X2]  115.57,29.72 0 top
FD19  FIDUCIAL1X2  [FIDUCIAL-1X2]  133.35,11.94 0 bottom
FD20  FIDUCIAL1X2  [FIDUCIAL-1X2]  133.35,11.94 0 top
FD21  FIDUCIAL1X2  [FIDUCIAL-1X2]  141.48,29.72 0 bottom
FD22  FIDUCIAL1X2  [FIDUCIAL-1X2]  141.48,29.72 0 top
FD23  FIDUCIAL1X2  [FIDUCIAL-1X2]  159.26,11.94 0 bottom
FD24  FIDUCIAL1X2  [FIDUCIAL-1X2]  159.26,11.94 0 top
FD25  FIDUCIAL1X2  [FIDUCIAL-1X2]  11.94,55.63 0 bottom
FD26  FIDUCIAL1X2  [FIDUCIAL-1X2]  11.94,55.63 0 top
FD27  FIDUCIAL1X2  [FIDUCIAL-1X2]  29.72,37.85 0 bottom
FD28  FIDUCIAL1X2  [FIDUCIAL-1X2]  29.72,37.85 0 top
FD29  FIDUCIAL1X2  [FIDUCIAL-1X2]  37.85,55.63 0 bottom
FD30  FIDUCIAL1X2  [FIDUCIAL-1X2]  37.85,55.63 0 top
FD31  FIDUCIAL1X2  [FIDUCIAL-1X2]  55.63,37.85 0 bottom
FD32  FIDUCIAL1X2  [FIDUCIAL-1X2]  55.63,37.85 0 top
FD33  FIDUCIAL1X2  [FIDUCIAL-1X2]  63.75,55.63 0 bottom
FD34  FIDUCIAL1X2  [FIDUCIAL-1X2]  63.75,55.63 0 top
FD35  FIDUCIAL1X2  [FIDUCIAL-1X2]  81.53,37.85 0 bottom
FD36  FIDUCIAL1X2  [FIDUCIAL-1X2]  81.53,37.85 0 top
FD37  FIDUCIAL1X2  [FIDUCIAL-1X2]  89.66,55.63 0 bottom
FD38  FIDUCIAL1X2  [FIDUCIAL-1X2]  89.66,55.63 0 top
FD39  FIDUCIAL1X2  [FIDUCIAL-1X2]  107.44,37.85 0 bottom
FD40  FIDUCIAL1X2  [FIDUCIAL-1X2]  107.44,37.85 0 top
FD41  FIDUCIAL1X2  [FIDUCIAL-1X2]  115.57,55.63 0 bottom
FD42  FIDUCIAL1X2  [FIDUCIAL-1X2]  115.57,55.63 0 top
FD43  FIDUCIAL1X2  [FIDUCIAL-1X2]  133.35,37.85 0 bottom
FD44  FIDUCIAL1X2  [FIDUCIAL-1X2]  133.35,37.85 0 top
FD45  FIDUCIAL1X2  [FIDUCIAL-1X2]  141.48,55.63 0 bottom
FD46  FIDUCIAL1X2  [FIDUCIAL-1X2]  141.48,55.63 0 top
FD47  FIDUCIAL1X2  [FIDUCIAL-1X2]  159.26,37.85 0 bottom
FD48  FIDUCIAL1X2  [FIDUCIAL-1X2]  159.26,37.85 0 top
FD49  FIDUCIAL1X2  [FIDUCIAL-1X2]  11.94,81.53 0 bottom
FD50  FIDUCIAL1X2  [FIDUCIAL-1X2]  11.94,81.53 0 top
FD51  FIDUCIAL1X2  [FIDUCIAL-1X2]  29.72,63.75 0 bottom
FD52  FIDUCIAL1X2  [FIDUCIAL-1X2]  29.72,63.75 0 top
FD53  FIDUCIAL1X2  [FIDUCIAL-1X2]  37.85,81.53 0 bottom
FD54  FIDUCIAL1X2  [FIDUCIAL-1X2]  37.85,81.53 0 top
FD55  FIDUCIAL1X2  [FIDUCIAL-1X2]  55.63,63.75 0 bottom
FD56  FIDUCIAL1X2  [FIDUCIAL-1X2]  55.63,63.75 0 top
FD57  FIDUCIAL1X2  [FIDUCIAL-1X2]  63.75,81.53 0 bottom
FD58  FIDUCIAL1X2  [FIDUCIAL-1X2]  63.75,81.53 0 top
FD59  FIDUCIAL1X2  [FIDUCIAL-1X2]  81.53,63.75 0 bottom
FD60  FIDUCIAL1X2  [FIDUCIAL-1X2]  81.53,63.75 0 top
FD61  FIDUCIAL1X2  [FIDUCIAL-1X2]  89.66,81.53 0 bottom
FD62  FIDUCIAL1X2  [FIDUCIAL-1X2]  89.66,81.53 0 top
FD63  FIDUCIAL1X2  [FIDUCIAL-1X2]  107.44,63.75 0 bottom
FD64  FIDUCIAL1X2  [FIDUCIAL-1X2]  107.44,63.75 0 top
FD65  FIDUCIAL1X2  [FIDUCIAL-1X2]  115.57,81.53 0 bottom
FD66  FIDUCIAL1X2  [FIDUCIAL-1X2]  115.57,81.53 0 top
FD67  FIDUCIAL1X2  [FIDUCIAL-1X2]  133.35,63.75 0 bottom
FD68  FIDUCIAL1X2  [FIDUCIAL-1X2]  133.35,63.75 0 top
FD69  FIDUCIAL1X2  [FIDUCIAL-1X2]  141.48,81.53 0 bottom
FD70  FIDUCIAL1X2  [FIDUCIAL-1X2]  141.48,81.53 0 top
FD71  FIDUCIAL1X2  [FIDUCIAL-1X2]  159.26,63.75 0 bottom
FD72  FIDUCIAL1X2  [FIDUCIAL-1X2]  159.26,63.75 0 top
FD73  FIDUCIAL1X2  [FIDUCIAL-1X2]  11.94,107.44 0 bottom
FD74  FIDUCIAL1X2  [FIDUCIAL-1X2]  11.94,107.44 0 top
FD75  FIDUCIAL1X2  [FIDUCIAL-1X2]  29.72,89.66 0 bottom
FD76  FIDUCIAL1X2  [FIDUCIAL-1X2]  29.72,89.66 0 top
FD77  FIDUCIAL1X2  [FIDUCIAL-1X2]  37.85,107.44 0 bottom
FD78  FIDUCIAL1X2  [FIDUCIAL-1X2]  37.85,107.44 0 top
FD79  FIDUCIAL1X2  [FIDUCIAL-1X2]  55.63,89.66 0 bottom
FD80  FIDUCIAL1X2  [FIDUCIAL-1X2]  55.63,89.66 0 top
FD81  FIDUCIAL1X2  [FIDUCIAL-1X2]  63.75,107.44 0 bottom
FD82  FIDUCIAL1X2  [FIDUCIAL-1X2]  63.75,107.44 0 top
FD83  FIDUCIAL1X2  [FIDUCIAL-1X2]  81.53,89.66 0 bottom
FD84  FIDUCIAL1X2  [FIDUCIAL-1X2]  81.53,89.66 0 top
FD85  FIDUCIAL1X2  [FIDUCIAL-1X2]  89.66,107.44 0 bottom
FD86  FIDUCIAL1X2  [FIDUCIAL-1X2]  89.66,107.44 0 top
FD87  FIDUCIAL1X2  [FIDUCIAL-1X2]  107.44,89.66 0 bottom
FD88  FIDUCIAL1X2  [FIDUCIAL-1X2]  107.44,89.66 0 top
FD89  FIDUCIAL1X2  [FIDUCIAL-1X2]  115.57,107.44 0 bottom
FD90  FIDUCIAL1X2  [FIDUCIAL-1X2]  115.57,107.44 0 top
FD91  FIDUCIAL1X2  [FIDUCIAL-1X2]  133.35,89.66 0 bottom
FD92  FIDUCIAL1X2  [FIDUCIAL-1X2]  133.35,89.66 0 top
FD93  FIDUCIAL1X2  [FIDUCIAL-1X2]  141.48,107.44 0 bottom
FD94  FIDUCIAL1X2  [FIDUCIAL-1X2]  141.48,107.44 0 top
FD95  FIDUCIAL1X2  [FIDUCIAL-1X2]  159.26,89.66 0 bottom
FD96  FIDUCIAL1X2  [FIDUCIAL-1X2]  159.26,89.66 0 top
H1  STAND-OFF  [STAND-OFF]  9.4,9.4 0 top
H2  STAND-OFF  [STAND-OFF]  9.4,29.72 0 top
H3  STAND-OFF  [STAND-OFF]  29.72,29.72 0 top
H4  STAND-OFF  [STAND-OFF]  29.72,9.4 0 top
H5  STAND-OFF  [STAND-OFF]  35.31,9.4 0 top
H6  STAND-OFF  [STAND-OFF]  35.31,29.72 0 top
H7  STAND-OFF  [STAND-OFF]  55.63,29.72 0 top
H8  STAND-OFF  [STAND-OFF]  55.63,9.4 0 top
H9  STAND-OFF  [STAND-OFF]  61.21,9.4 0 top
H10  STAND-OFF  [STAND-OFF]  61.21,29.72 0 top
H11  STAND-OFF  [STAND-OFF]  81.53,29.72 0 top
H12  STAND-OFF  [STAND-OFF]  81.53,9.4 0 top
H13  STAND-OFF  [STAND-OFF]  87.12,9.4 0 top
H14  STAND-OFF  [STAND-OFF]  87.12,29.72 0 top
H15  STAND-OFF  [STAND-OFF]  107.44,29.72 0 top
H16  STAND-OFF  [STAND-OFF]  107.44,9.4 0 top
H17  STAND-OFF  [STAND-OFF]  113.03,9.4 0 top
H18  STAND-OFF  [STAND-OFF]  113.03,29.72 0 top
H19  STAND-OFF  [STAND-OFF]  133.35,29.72 0 top
H20  STAND-OFF  [STAND-OFF]  133.35,9.4 0 top
H21  STAND-OFF  [STAND-OFF]  138.94,9.4 0 top
H22  STAND-OFF  [STAND-OFF]  138.94,29.72 0 top
H23  STAND-OFF  [STAND-OFF]  159.26,29.72 0 top
H24  STAND-OFF  [STAND-OFF]  159.26,9.4 0 top
H25  STAND-OFF  [STAND-OFF]  9.4,35.31 0 top
H26  STAND-OFF  [STAND-OFF]  9.4,55.63 0 top
H27  STAND-OFF  [STAND-OFF]  29.72,55.63 0 top
H28  STAND-OFF  [STAND-OFF]  29.72,35.31 0 top
H29  STAND-OFF  [STAND-OFF]  35.31,35.31 0 top
H30  STAND-OFF  [STAND-OFF]  35.31,55.63 0 top
H31  STAND-OFF  [STAND-OFF]  55.63,55.63 0 top
H32  STAND-OFF  [STAND-OFF]  55.63,35.31 0 top
H33  STAND-OFF  [STAND-OFF]  61.21,35.31 0 top
H34  STAND-OFF  [STAND-OFF]  61.21,55.63 0 top
H35  STAND-OFF  [STAND-OFF]  81.53,55.63 0 top
H36  STAND-OFF  [STAND-OFF]  81.53,35.31 0 top
H37  STAND-OFF  [STAND-OFF]  87.12,35.31 0 top
H38  STAND-OFF  [STAND-OFF]  87.12,55.63 0 top
H39  STAND-OFF  [STAND-OFF]  107.44,55.63 0 top
H40  STAND-OFF  [STAND-OFF]  107.44,35.31 0 top
H41  STAND-OFF  [STAND-OFF]  113.03,35.31 0 top
H42  STAND-OFF  [STAND-OFF]  113.03,55.63 0 top
H43  STAND-OFF  [STAND-OFF]  133.35,55.63 0 top
H44  STAND-OFF  [STAND-OFF]  133.35,35.31 0 top
H45  STAND-OFF  [STAND-OFF]  138.94,35.31 0 top
H46  STAND-OFF  [STAND-OFF]  138.94,55.63 0 top
H47  STAND-OFF  [STAND-OFF]  159.26,55.63 0 top
H48  STAND-OFF  [STAND-OFF]  159.26,35.31 0 top
H49  STAND-OFF  [STAND-OFF]  9.4,61.21 0 top
H50  STAND-OFF  [STAND-OFF]  9.4,81.53 0 top
H51  STAND-OFF  [STAND-OFF]  29.72,81.53 0 top
H52  STAND-OFF  [STAND-OFF]  29.72,61.21 0 top
H53  STAND-OFF  [STAND-OFF]  35.31,61.21 0 top
H54  STAND-OFF  [STAND-OFF]  35.31,81.53 0 top
H55  STAND-OFF  [STAND-OFF]  55.63,81.53 0 top
H56  STAND-OFF  [STAND-OFF]  55.63,61.21 0 top
H57  STAND-OFF  [STAND-OFF]  61.21,61.21 0 top
H58  STAND-OFF  [STAND-OFF]  61.21,81.53 0 top
H59  STAND-OFF  [STAND-OFF]  81.53,81.53 0 top
H60  STAND-OFF  [STAND-OFF]  81.53,61.21 0 top
H61  STAND-OFF  [STAND-OFF]  87.12,61.21 0 top
H62  STAND-OFF  [STAND-OFF]  87.12,81.53 0 top
H63  STAND-OFF  [STAND-OFF]  107.44,81.53 0 top
H64  STAND-OFF  [STAND-OFF]  107.44,61.21 0 top
H65  STAND-OFF  [STAND-OFF]  113.03,61.21 0 top
H66  STAND-OFF  [STAND-OFF]  113.03,81.53 0 top
H67  STAND-OFF  [STAND-OFF]  133.35,81.53 0 top
H68  STAND-OFF  [STAND-OFF]  133.35,61.21 0 top
H69  STAND-OFF  [STAND-OFF]  138.94,61.21 0 top
H70  STAND-OFF  [STAND-OFF]  138.94,81.53 0 top
H71  STAND-OFF  [STAND-OFF]  159.26,81.53 0 top
H72  STAND-OFF  [STAND-OFF]  159.26,61.21 0 top
H73  STAND-OFF  [STAND-OFF]  9.4,87.12 0 top
H74  STAND-OFF  [STAND-OFF]  9.4,107.44 0 top
H75  STAND-OFF  [STAND-OFF]  29.72,107.44 0 top
H76  STAND-OFF  [STAND-OFF]  29.72,87.12 0 top
H77  STAND-OFF  [STAND-OFF]  35.31,87.12 0 top
H78  STAND-OFF  [STAND-OFF]  35.31,107.44 0 top
H79  STAND-OFF  [STAND-OFF]  55.63,107.44 0 top
H80  STAND-OFF  [STAND-OFF]  55.63,87.12 0 top
H81  STAND-OFF  [STAND-OFF]  61.21,87.12 0 top
H82  STAND-OFF  [STAND-OFF]  61.21,107.44 0 top
H83  STAND-OFF  [STAND-OFF]  81.53,107.44 0 top
H84  STAND-OFF  [STAND-OFF]  81.53,87.12 0 top
H85  STAND-OFF  [STAND-OFF]  87.12,87.12 0 top
H86  STAND-OFF  [STAND-OFF]  87.12,107.44 0 top
H87  STAND-OFF  [STAND-OFF]  107.44,107.44 0 top
H88  STAND-OFF  [STAND-OFF]  107.44,87.12 0 top
H89  STAND-OFF  [STAND-OFF]  113.03,87.12 0 top
H90  STAND-OFF  [STAND-OFF]  113.03,107.44 0 top
H91  STAND-OFF  [STAND-OFF]  133.35,107.44 0 top
H92  STAND-OFF  [STAND-OFF]  133.35,87.12 0 top
H93  STAND-OFF  [STAND-OFF]  138.94,87.12 0 top
H94  STAND-OFF  [STAND-OFF]  138.94,107.44 0 top
H95  STAND-OFF  [STAND-OFF]  159.26,107.44 0 top
H96  STAND-OFF  [STAND-OFF]  159.26,87.12 0 top
I2C  JUMPER-SMT_3_2-NC_TRACE_SILK  [SMT-JUMPER_3_2-NC_TRACE_SILK]  30.48,24 90 bottom
I2C1  JUMPER-SMT_3_2-NC_TRACE_SILK  [SMT-JUMPER_3_2-NC_TRACE_SILK]  56.39,24 90 bottom
I2C2  JUMPER-SMT_3_2-NC_TRACE_SILK  [SMT-JUMPER_3_2-NC_TRACE_SILK]  82.3,24 90 bottom
I2C3  JUMPER-SMT_3_2-NC_TRACE_SILK  [SMT-JUMPER_3_2-NC_TRACE_SILK]  108.2,24 90 bottom
I2C4  JUMPER-SMT_3_2-NC_TRACE_SILK  [SMT-JUMPER_3_2-NC_TRACE_SILK]  134.11,24 90 bottom
I2C5  JUMPER-SMT_3_2-NC_TRACE_SILK  [SMT-JUMPER_3_2-NC_TRACE_SILK]  160.02,24 90 bottom
I2C6  JUMPER-SMT_3_2-NC_TRACE_SILK  [SMT-JUMPER_3_2-NC_TRACE_SILK]  30.48,49.91 90 bottom
I2C7  JUMPER-SMT_3_2-NC_TRACE_SILK  [SMT-JUMPER_3_2-NC_TRACE_SILK]  56.39,49.91 90 bottom
I2C8  JUMPER-SMT_3_2-NC_TRACE_SILK  [SMT-JUMPER_3_2-NC_TRACE_SILK]  82.3,49.91 90 bottom
I2C9  JUMPER-SMT_3_2-NC_TRACE_SILK  [SMT-JUMPER_3_2-NC_TRACE_SILK]  108.2,49.91 90 bottom
I2C10  JUMPER-SMT_3_2-NC_TRACE_SILK  [SMT-JUMPER_3_2-NC_TRACE_SILK]  134.11,49.91 90 bottom
I2C11  JUMPER-SMT_3_2-NC_TRACE_SILK  [SMT-JUMPER_3_2-NC_TRACE_SILK]  160.02,49.91 90 bottom
I2C12  JUMPER-SMT_3_2-NC_TRACE_SILK  [SMT-JUMPER_3_2-NC_TRACE_SILK]  30.48,75.82 90 bottom
I2C13  JUMPER-SMT_3_2-NC_TRACE_SILK  [SMT-JUMPER_3_2-NC_TRACE_SILK]  56.39,75.82 90 bottom
I2C14  JUMPER-SMT_3_2-NC_TRACE_SILK  [SMT-JUMPER_3_2-NC_TRACE_SILK]  82.3,75.82 90 bottom
I2C15  JUMPER-SMT_3_2-NC_TRACE_SILK  [SMT-JUMPER_3_2-NC_TRACE_SILK]  108.2,75.82 90 bottom
I2C16  JUMPER-SMT_3_2-NC_TRACE_SILK  [SMT-JUMPER_3_2-NC_TRACE_SILK]  134.11,75.82 90 bottom
I2C17  JUMPER-SMT_3_2-NC_TRACE_SILK  [SMT-JUMPER_3_2-NC_TRACE_SILK]  160.02,75.82 90 bottom
I2C18  JUMPER-SMT_3_2-NC_TRACE_SILK  [SMT-JUMPER_3_2-NC_TRACE_SILK]  30.48,101.73 90 bottom
I2C19  JUMPER-SMT_3_2-NC_TRACE_SILK  [SMT-JUMPER_3_2-NC_TRACE_SILK]  56.39,101.73 90 bottom
I2C20  JUMPER-SMT_3_2-NC_TRACE_SILK  [SMT-JUMPER_3_2-NC_TRACE_SILK]  82.3,101.73 90 bottom
I2C21  JUMPER-SMT_3_2-NC_TRACE_SILK  [SMT-JUMPER_3_2-NC_TRACE_SILK]  108.2,101.73 90 bottom
I2C22  JUMPER-SMT_3_2-NC_TRACE_SILK  [SMT-JUMPER_3_2-NC_TRACE_SILK]  134.11,101.73 90 bottom
I2C23  JUMPER-SMT_3_2-NC_TRACE_SILK  [SMT-JUMPER_3_2-NC_TRACE_SILK]  160.02,101.73 90 bottom
J1  QWIIC_RIGHT_ANGLE  [JST04_1MM_RA]  27.18,19.56 90 top
J2  QWIIC_RIGHT_ANGLE  [JST04_1MM_RA]  11.94,19.56 270 top
J3  [1X06_NO_SILK]  13.21,8.13 0 top
J4  QWIIC_RIGHT_ANGLE  [JST04_1MM_RA]  53.09,19.56 90 top
J5  QWIIC_RIGHT_ANGLE  [JST04_1MM_RA]  37.85,19.56 270 top
J6  [1X06_NO_SILK]  39.12,8.13 0 top
J7  QWIIC_RIGHT_ANGLE  [JST04_1MM_RA]  78.99,19.56 90 top
J8  QWIIC_RIGHT_ANGLE  [JST04_1MM_RA]  63.75,19.56 270 top
J9  [1X06_NO_SILK]  65.02,8.13 0 top
J10  QWIIC_RIGHT_ANGLE  [JST04_1MM_RA]  104.9,19.56 90 top
J11  QWIIC_RIGHT_ANGLE  [JST04_1MM_RA]  89.66,19.56 270 top
J12  [1X06_NO_SILK]  90.93,8.13 0 top
J13  QWIIC_RIGHT_ANGLE  [JST04_1MM_RA]  130.81,19.56 90 top
J14  QWIIC_RIGHT_ANGLE  [JST04_1MM_RA]  115.57,19.56 270 top
J15  [1X06_NO_SILK]  116.84,8.13 0 top
J16  QWIIC_RIGHT_ANGLE  [JST04_1MM_RA]  156.72,19.56 90 top
J17  QWIIC_RIGHT_ANGLE  [JST04_1MM_RA]  141.48,19.56 270 top
J18  [1X06_NO_SILK]  142.75,8.13 0 top
J19  QWIIC_RIGHT_ANGLE  [JST04_1MM_RA]  27.18,45.47 90 top
J20  QWIIC_RIGHT_ANGLE  [JST04_1MM_RA]  11.94,45.47 270 top
J21  [1X06_NO_SILK]  13.21,34.04 0 top
J22  QWIIC_RIGHT_ANGLE  [JST04_1MM_RA]  53.09,45.47 90 top
J23  QWIIC_RIGHT_ANGLE  [JST04_1MM_RA]  37.85,45.47 270 top
J24  [1X06_NO_SILK]  39.12,34.04 0 top
J25  QWIIC_RIGHT_ANGLE  [JST04_1MM_RA]  78.99,45.47 90 top
J26  QWIIC_RIGHT_ANGLE  [JST04_1MM_RA]  63.75,45.47 270 top
J27  [1X06_NO_SILK]  65.02,34.04 0 top
J28  QWIIC_RIGHT_ANGLE  [JST04_1MM_RA]  104.9,45.47 90 top
J29  QWIIC_RIGHT_ANGLE  [JST04_1MM_RA]  89.66,45.47 270 top
J30  [1X06_NO_SILK]  90.93,34.04 0 top
J31  QWIIC_RIGHT_ANGLE  [JST04_1MM_RA]  130.81,45.47 90 top
J32  QWIIC_RIGHT_ANGLE  [JST04_1MM_RA]  115.57,45.47 270 top
J33  [1X06_NO_SILK]  116.84,34.04 0 top
J34  QWIIC_RIGHT_ANGLE  [JST04_1MM_RA]  156.72,45.47 90 top
J35  QWIIC_RIGHT_ANGLE  [JST04_1MM_RA]  141.48,45.47 270 top
J36  [1X06_NO_SILK]  142.75,34.04 0 top
J37  QWIIC_RIGHT_ANGLE  [JST04_1MM_RA]  27.18,71.37 90 top
J38  QWIIC_RIGHT_ANGLE  [JST04_1MM_RA]  11.94,71.37 270 top
J39  [1X06_NO_SILK]  13.21,59.94 0 top
J40  QWIIC_RIGHT_ANGLE  [JST04_1MM_RA]  53.09,71.37 90 top
J41  QWIIC_RIGHT_ANGLE  [JST04_1MM_RA]  37.85,71.37 270 top
J42  [1X06_NO_SILK]  39.12,59.94 0 top
J43  QWIIC_RIGHT_ANGLE  [JST04_1MM_RA]  78.99,71.37 90 top
J44  QWIIC_RIGHT_ANGLE  [JST04_1MM_RA]  63.75,71.37 270 top
J45  [1X06_NO_SILK]  65.02,59.94 0 top
J46  QWIIC_RIGHT_ANGLE  [JST04_1MM_RA]  104.9,71.37 90 top
J47  QWIIC_RIGHT_ANGLE  [JST04_1MM_RA]  89.66,71.37 270 top
J48  [1X06_NO_SILK]  90.93,59.94 0 top
J49  QWIIC_RIGHT_ANGLE  [JST04_1MM_RA]  130.81,71.37 90 top
J50  QWIIC_RIGHT_ANGLE  [JST04_1MM_RA]  115.57,71.37 270 top
J51  [1X06_NO_SILK]  116.84,59.94 0 top
J52  QWIIC_RIGHT_ANGLE  [JST04_1MM_RA]  156.72,71.37 90 top
J53  QWIIC_RIGHT_ANGLE  [JST04_1MM_RA]  141.48,71.37 270 top
J54  [1X06_NO_SILK]  142.75,59.94 0 top
J55  QWIIC_RIGHT_ANGLE  [JST04_1MM_RA]  27.18,97.28 90 top
J56  QWIIC_RIGHT_ANGLE  [JST04_1MM_RA]  11.94,97.28 270 top
J57  [1X06_NO_SILK]  13.21,85.85 0 top
J58  QWIIC_RIGHT_ANGLE  [JST04_1MM_RA]  53.09,97.28 90 top
J59  QWIIC_RIGHT_ANGLE  [JST04_1MM_RA]  37.85,97.28 270 top
J60  [1X06_NO_SILK]  39.12,85.85 0 top
J61  QWIIC_RIGHT_ANGLE  [JST04_1MM_RA]  78.99,97.28 90 top
J62  QWIIC_RIGHT_ANGLE  [JST04_1MM_RA]  63.75,97.28 270 top
J63  [1X06_NO_SILK]  65.02,85.85 0 top
J64  QWIIC_RIGHT_ANGLE  [JST04_1MM_RA]  104.9,97.28 90 top
J65  QWIIC_RIGHT_ANGLE  [JST04_1MM_RA]  89.66,97.28 270 top
J66  [1X06_NO_SILK]  90.93,85.85 0 top
J67  QWIIC_RIGHT_ANGLE  [JST04_1MM_RA]  130.81,97.28 90 top
J68  QWIIC_RIGHT_ANGLE  [JST04_1MM_RA]  115.57,97.28 270 top
J69  [1X06_NO_SILK]  116.84,85.85 0 top
J70  QWIIC_RIGHT_ANGLE  [JST04_1MM_RA]  156.72,97.28 90 top
J71  QWIIC_RIGHT_ANGLE  [JST04_1MM_RA]  141.48,97.28 270 top
J72  [1X06_NO_SILK]  142.75,85.85 0 top
LOGO1  OSHW-LOGOS  [OSHW-LOGO-S]  29.08,14.48 0 top
LOGO2  QWIIC_LOGO_5MM  [QWIIC_5MM]  10.03,15.11 0 top
LOGO3  SFE_LOGO_NAME_FLAME.1_INCH  [SFE_LOGO_NAME_FLAME_.1]  19.56,28.32 0 top
LOGO4  OSHW-LOGOS  [OSHW-LOGO-S]  54.99,14.48 0 top
LOGO5  QWIIC_LOGO_5MM  [QWIIC_5MM]  35.94,15.11 0 top
LOGO6  SFE_LOGO_NAME_FLAME.1_INCH  [SFE_LOGO_NAME_FLAME_.1]  45.47,28.32 0 top
LOGO7  OSHW-LOGOS  [OSHW-LOGO-S]  80.9,14.48 0 top
LOGO8  QWIIC_LOGO_5MM  [QWIIC_5MM]  61.85,15.11 0 top
LOGO9  SFE_LOGO_NAME_FLAME.1_INCH  [SFE_LOGO_NAME_FLAME_.1]  71.37,28.32 0 top
LOGO10  OSHW-LOGOS  [OSHW-LOGO-S]  106.81,14.48 0 top
LOGO11  QWIIC_LOGO_5MM  [QWIIC_5MM]  87.76,15.11 0 top
LOGO12  SFE_LOGO_NAME_FLAME.1_INCH  [SFE_LOGO_NAME_FLAME_.1]  97.28,28.32 0 top
LOGO13  OSHW-LOGOS  [OSHW-LOGO-S]  132.72,14.48 0 top
LOGO14  QWIIC_LOGO_5MM  [QWIIC_5MM]  113.67,15.11 0 top
LOGO15  SFE_LOGO_NAME_FLAME.1_INCH  [SFE_LOGO_NAME_FLAME_.1]  123.19,28.32 0 top
LOGO16  OSHW-LOGOS  [OSHW-LOGO-S]  158.62,14.48 0 top
LOGO17  QWIIC_LOGO_5MM  [QWIIC_5MM]  139.57,15.11 0 top
LOGO18  SFE_LOGO_NAME_FLAME.1_INCH  [SFE_LOGO_NAME_FLAME_.1]  149.1,28.32 0 top
LOGO19  OSHW-LOGOS  [OSHW-LOGO-S]  29.08,40.39 0 top
LOGO20  QWIIC_LOGO_5MM  [QWIIC_5MM]  10.03,41.02 0 top
LOGO21  SFE_LOGO_NAME_FLAME.1_INCH  [SFE_LOGO_NAME_FLAME_.1]  19.56,54.23 0 top
LOGO22  OSHW-LOGOS  [OSHW-LOGO-S]  54.99,40.39 0 top
LOGO23  QWIIC_LOGO_5MM  [QWIIC_5MM]  35.94,41.02 0 top
LOGO24  SFE_LOGO_NAME_FLAME.1_INCH  [SFE_LOGO_NAME_FLAME_.1]  45.47,54.23 0 top
LOGO25  OSHW-LOGOS  [OSHW-LOGO-S]  80.9,40.39 0 top
LOGO26  QWIIC_LOGO_5MM  [QWIIC_5MM]  61.85,41.02 0 top
LOGO27  SFE_LOGO_NAME_FLAME.1_INCH  [SFE_LOGO_NAME_FLAME_.1]  71.37,54.23 0 top
LOGO28  OSHW-LOGOS  [OSHW-LOGO-S]  106.81,40.39 0 top
LOGO29  QWIIC_LOGO_5MM  [QWIIC_5MM]  87.76,41.02 0 top
LOGO30  SFE_LOGO_NAME_FLAME.1_INCH  [SFE_LOGO_NAME_FLAME_.1]  97.28,54.23 0 top
LOGO31  OSHW-LOGOS  [OSHW-LOGO-S]  132.72,40.39 0 top
LOGO32  QWIIC_LOGO_5MM  [QWIIC_5MM]  113.67,41.02 0 top
LOGO33  SFE_LOGO_NAME_FLAME.1_INCH  [SFE_LOGO_NAME_FLAME_.1]  123.19,54.23 0 top
LOGO34  OSHW-LOGOS  [OSHW-LOGO-S]  158.62,40.39 0 top
LOGO35  QWIIC_LOGO_5MM  [QWIIC_5MM]  139.57,41.02 0 top
LOGO36  SFE_LOGO_NAME_FLAME.1_INCH  [SFE_LOGO_NAME_FLAME_.1]  149.1,54.23 0 top
LOGO37  OSHW-LOGOS  [OSHW-LOGO-S]  29.08,66.29 0 top
LOGO38  QWIIC_LOGO_5MM  [QWIIC_5MM]  10.03,66.93 0 top
LOGO39  SFE_LOGO_NAME_FLAME.1_INCH  [SFE_LOGO_NAME_FLAME_.1]  19.56,80.14 0 top
LOGO40  OSHW-LOGOS  [OSHW-LOGO-S]  54.99,66.29 0 top
LOGO41  QWIIC_LOGO_5MM  [QWIIC_5MM]  35.94,66.93 0 top
LOGO42  SFE_LOGO_NAME_FLAME.1_INCH  [SFE_LOGO_NAME_FLAME_.1]  45.47,80.14 0 top
LOGO43  OSHW-LOGOS  [OSHW-LOGO-S]  80.9,66.29 0 top
LOGO44  QWIIC_LOGO_5MM  [QWIIC_5MM]  61.85,66.93 0 top
LOGO45  SFE_LOGO_NAME_FLAME.1_INCH  [SFE_LOGO_NAME_FLAME_.1]  71.37,80.14 0 top
LOGO46  OSHW-LOGOS  [OSHW-LOGO-S]  106.81,66.29 0 top
LOGO47  QWIIC_LOGO_5MM  [QWIIC_5MM]  87.76,66.93 0 top
LOGO48  SFE_LOGO_NAME_FLAME.1_INCH  [SFE_LOGO_NAME_FLAME_.1]  97.28,80.14 0 top
LOGO49  OSHW-LOGOS  [OSHW-LOGO-S]  132.72,66.29 0 top
LOGO50  QWIIC_LOGO_5MM  [QWIIC_5MM]  113.67,66.93 0 top
LOGO51  SFE_LOGO_NAME_FLAME.1_INCH  [SFE_LOGO_NAME_FLAME_.1]  123.19,80.14 0 top
LOGO52  OSHW-LOGOS  [OSHW-LOGO-S]  158.62,66.29 0 top
LOGO53  QWIIC_LOGO_5MM  [QWIIC_5MM]  139.57,66.93 0 top
LOGO54  SFE_LOGO_NAME_FLAME.1_INCH  [SFE_LOGO_NAME_FLAME_.1]  149.1,80.14 0 top
LOGO55  OSHW-LOGOS  [OSHW-LOGO-S]  29.08,92.2 0 top
LOGO56  QWIIC_LOGO_5MM  [QWIIC_5MM]  10.03,92.84 0 top
LOGO57  SFE_LOGO_NAME_FLAME.1_INCH  [SFE_LOGO_NAME_FLAME_.1]  19.56,106.05 0 top
LOGO58  OSHW-LOGOS  [OSHW-LOGO-S]  54.99,92.2 0 top
LOGO59  QWIIC_LOGO_5MM  [QWIIC_5MM]  35.94,92.84 0 top
LOGO60  SFE_LOGO_NAME_FLAME.1_INCH  [SFE_LOGO_NAME_FLAME_.1]  45.47,106.05 0 top
LOGO61  OSHW-LOGOS  [OSHW-LOGO-S]  80.9,92.2 0 top
LOGO62  QWIIC_LOGO_5MM  [QWIIC_5MM]  61.85,92.84 0 top
LOGO63  SFE_LOGO_NAME_FLAME.1_INCH  [SFE_LOGO_NAME_FLAME_.1]  71.37,106.05 0 top
LOGO64  OSHW-LOGOS  [OSHW-LOGO-S]  106.81,92.2 0 top
LOGO65  QWIIC_LOGO_5MM  [QWIIC_5MM]  87.76,92.84 0 top
LOGO66  SFE_LOGO_NAME_FLAME.1_INCH  [SFE_LOGO_NAME_FLAME_.1]  97.28,106.05 0 top
LOGO67  OSHW-LOGOS  [OSHW-LOGO-S]  132.72,92.2 0 top
LOGO68  QWIIC_LOGO_5MM  [QWIIC_5MM]  113.67,92.84 0 top
LOGO69  SFE_LOGO_NAME_FLAME.1_INCH  [SFE_LOGO_NAME_FLAME_.1]  123.19,106.05 0 top
LOGO70  OSHW-LOGOS  [OSHW-LOGO-S]  158.62,92.2 0 top
LOGO71  QWIIC_LOGO_5MM  [QWIIC_5MM]  139.57,92.84 0 top
LOGO72  SFE_LOGO_NAME_FLAME.1_INCH  [SFE_LOGO_NAME_FLAME_.1]  149.1,106.05 0 top
PWR  JUMPER-SMT_2_NC_TRACE_SILK  [SMT-JUMPER_2_NC_TRACE_SILK]  8.76,22.73 270 bottom
PWR1  JUMPER-SMT_2_NC_TRACE_SILK  [SMT-JUMPER_2_NC_TRACE_SILK]  34.67,22.73 270 bottom
PWR2  JUMPER-SMT_2_NC_TRACE_SILK  [SMT-JUMPER_2_NC_TRACE_SILK]  60.58,22.73 270 bottom
PWR3  JUMPER-SMT_2_NC_TRACE_SILK  [SMT-JUMPER_2_NC_TRACE_SILK]  86.49,22.73 270 bottom
PWR4  JUMPER-SMT_2_NC_TRACE_SILK  [SMT-JUMPER_2_NC_TRACE_SILK]  112.4,22.73 270 bottom
PWR5  JUMPER-SMT_2_NC_TRACE_SILK  [SMT-JUMPER_2_NC_TRACE_SILK]  138.3,22.73 270 bottom
PWR6  JUMPER-SMT_2_NC_TRACE_SILK  [SMT-JUMPER_2_NC_TRACE_SILK]  8.76,48.64 270 bottom
PWR7  JUMPER-SMT_2_NC_TRACE_SILK  [SMT-JUMPER_2_NC_TRACE_SILK]  34.67,48.64 270 bottom
PWR8  JUMPER-SMT_2_NC_TRACE_SILK  [SMT-JUMPER_2_NC_TRACE_SILK]  60.58,48.64 270 bottom
PWR9  JUMPER-SMT_2_NC_TRACE_SILK  [SMT-JUMPER_2_NC_TRACE_SILK]  86.49,48.64 270 bottom
PWR10  JUMPER-SMT_2_NC_TRACE_SILK  [SMT-JUMPER_2_NC_TRACE_SILK]  112.4,48.64 270 bottom
PWR11  JUMPER-SMT_2_NC_TRACE_SILK  [SMT-JUMPER_2_NC_TRACE_SILK]  138.3,48.64 270 bottom
PWR12  JUMPER-SMT_2_NC_TRACE_SILK  [SMT-JUMPER_2_NC_TRACE_SILK]  8.76,74.55 270 bottom
PWR13  JUMPER-SMT_2_NC_TRACE_SILK  [SMT-JUMPER_2_NC_TRACE_SILK]  34.67,74.55 270 bottom
PWR14  JUMPER-SMT_2_NC_TRACE_SILK  [SMT-JUMPER_2_NC_TRACE_SILK]  60.58,74.55 270 bottom
PWR15  JUMPER-SMT_2_NC_TRACE_SILK  [SMT-JUMPER_2_NC_TRACE_SILK]  86.49,74.55 270 bottom
PWR16  JUMPER-SMT_2_NC_TRACE_SILK  [SMT-JUMPER_2_NC_TRACE_SILK]  112.4,74.55 270 bottom
PWR17  JUMPER-SMT_2_NC_TRACE_SILK  [SMT-JUMPER_2_NC_TRACE_SILK]  138.3,74.55 270 bottom
PWR18  JUMPER-SMT_2_NC_TRACE_SILK  [SMT-JUMPER_2_NC_TRACE_SILK]  8.76,100.46 270 bottom
PWR19  JUMPER-SMT_2_NC_TRACE_SILK  [SMT-JUMPER_2_NC_TRACE_SILK]  34.67,100.46 270 bottom
PWR20  JUMPER-SMT_2_NC_TRACE_SILK  [SMT-JUMPER_2_NC_TRACE_SILK]  60.58,100.46 270 bottom
PWR21  JUMPER-SMT_2_NC_TRACE_SILK  [SMT-JUMPER_2_NC_TRACE_SILK]  86.49,100.46 270 bottom
PWR22  JUMPER-SMT_2_NC_TRACE_SILK  [SMT-JUMPER_2_NC_TRACE_SILK]  112.4,100.46 270 bottom
PWR23  JUMPER-SMT_2_NC_TRACE_SILK  [SMT-JUMPER_2_NC_TRACE_SILK]  138.3,100.46 270 bottom
Q1  100mA/20V/3.8Ω  [SOT-416FL]  13.72,25.91 0 top
Q2  100mA/20V/3.8Ω  [SOT-416FL]  16.38,14.99 90 top
Q3  100mA/20V/3.8Ω  [SOT-416FL]  39.62,25.91 0 top
Q4  100mA/20V/3.8Ω  [SOT-416FL]  42.29,14.99 90 top
Q5  100mA/20V/3.8Ω  [SOT-416FL]  65.53,25.91 0 top
Q6  100mA/20V/3.8Ω  [SOT-416FL]  68.2,14.99 90 top
Q7  100mA/20V/3.8Ω  [SOT-416FL]  91.44,25.91 0 top
Q8  100mA/20V/3.8Ω  [SOT-416FL]  94.11,14.99 90 top
Q9  100mA/20V/3.8Ω  [SOT-416FL]  117.35,25.91 0 top
Q10  100mA/20V/3.8Ω  [SOT-416FL]  120.02,14.99 90 top
Q11  100mA/20V/3.8Ω  [SOT-416FL]  143.26,25.91 0 top
Q12  100mA/20V/3.8Ω  [SOT-416FL]  145.92,14.99 90 top
Q13  100mA/20V/3.8Ω  [SOT-416FL]  13.72,51.82 0 top
Q14  100mA/20V/3.8Ω  [SOT-416FL]  16.38,40.89 90 top
Q15  100mA/20V/3.8Ω  [SOT-416FL]  39.62,51.82 0 top
Q16  100mA/20V/3.8Ω  [SOT-416FL]  42.29,40.89 90 top
Q17  100mA/20V/3.8Ω  [SOT-416FL]  65.53,51.82 0 top
Q18  100mA/20V/3.8Ω  [SOT-416FL]  68.2,40.89 90 top
Q19  100mA/20V/3.8Ω  [SOT-416FL]  91.44,51.82 0 top
Q20  100mA/20V/3.8Ω  [SOT-416FL]  94.11,40.89 90 top
Q21  100mA/20V/3.8Ω  [SOT-416FL]  117.35,51.82 0 top
Q22  100mA/20V/3.8Ω  [SOT-416FL]  120.02,40.89 90 top
Q23  100mA/20V/3.8Ω  [SOT-416FL]  143.26,51.82 0 top
Q24  100mA/20V/3.8Ω  [SOT-416FL]  145.92,40.89 90 top
Q25  100mA/20V/3.8Ω  [SOT-416FL]  13.72,77.72 0 top
Q26  100mA/20V/3.8Ω  [SOT-416FL]  16.38,66.8 90 top
Q27  100mA/20V/3.8Ω  [SOT-416FL]  39.62,77.72 0 top
Q28  100mA/20V/3.8Ω  [SOT-416FL]  42.29,66.8 90 top
Q29  100mA/20V/3.8Ω  [SOT-416FL]  65.53,77.72 0 top
Q30  100mA/20V/3.8Ω  [SOT-416FL]  68.2,66.8 90 top
Q31  100mA/20V/3.8Ω  [SOT-416FL]  91.44,77.72 0 top
Q32  100mA/20V/3.8Ω  [SOT-416FL]  94.11,66.8 90 top
Q33  100mA/20V/3.8Ω  [SOT-416FL]  117.35,77.72 0 top
Q34  100mA/20V/3.8Ω  [SOT-416FL]  120.02,66.8 90 top
Q35  100mA/20V/3.8Ω  [SOT-416FL]  143.26,77.72 0 top
Q36  100mA/20V/3.8Ω  [SOT-416FL]  145.92,66.8 90 top
Q37  100mA/20V/3.8Ω  [SOT-416FL]  13.72,103.63 0 top
Q38  100mA/20V/3.8Ω  [SOT-416FL]  16.38,92.71 90 top
Q39  100mA/20V/3.8Ω  [SOT-416FL]  39.62,103.63 0 top
Q40  100mA/20V/3.8Ω  [SOT-416FL]  42.29,92.71 90 top
Q41  100mA/20V/3.8Ω  [SOT-416FL]  65.53,103.63 0 top
Q42  100mA/20V/3.8Ω  [SOT-416FL]  68.2,92.71 90 top
Q43  100mA/20V/3.8Ω  [SOT-416FL]  91.44,103.63 0 top
Q44  100mA/20V/3.8Ω  [SOT-416FL]  94.11,92.71 90 top
Q45  100mA/20V/3.8Ω  [SOT-416FL]  117.35,103.63 0 top
Q46  100mA/20V/3.8Ω  [SOT-416FL]  120.02,92.71 90 top
Q47  100mA/20V/3.8Ω  [SOT-416FL]  143.26,103.63 0 top
Q48  100mA/20V/3.8Ω  [SOT-416FL]  145.92,92.71 90 top
R1  4.7k  [0603]  9.4,25.27 180 bottom
R2  100k  [0603]  13.72,23.37 0 top
R3  2.2k  [0603]  27.81,24.77 180 bottom
R4  2.2k  [0603]  27.81,23.24 180 bottom
R5  100k  [0603]  19.56,15.49 180 top
R6  1k  [0603]  16.89,21.59 270 top
R7  100k  [0603]  24,30.35 180 top
R8  4.7k  [0603]  35.31,25.27 180 bottom
R9  2.2k  [0603]  53.72,24.77 180 bottom
R10  2.2k  [0603]  53.72,23.24 180 bottom
R11  100k  [0603]  39.62,23.37 0 top
R12  100k  [0603]  45.47,15.49 180 top
R13  1k  [0603]  42.8,21.59 270 top
R14  100k  [0603]  49.91,30.35 180 top
R15  4.7k  [0603]  61.21,25.27 180 bottom
R16  2.2k  [0603]  79.63,24.77 180 bottom
R17  2.2k  [0603]  79.63,23.24 180 bottom
R18  100k  [0603]  65.53,23.37 0 top
R19  100k  [0603]  71.37,15.49 180 top
R20  1k  [0603]  68.71,21.59 270 top
R21  100k  [0603]  75.82,30.35 180 top
R22  4.7k  [0603]  87.12,25.27 180 bottom
R23  2.2k  [0603]  105.54,24.77 180 bottom
R24  2.2k  [0603]  105.54,23.24 180 bottom
R25  100k  [0603]  91.44,23.37 0 top
R26  100k  [0603]  97.28,15.49 180 top
R27  1k  [0603]  94.62,21.59 270 top
R28  100k  [0603]  101.73,30.35 180 top
R29  4.7k  [0603]  113.03,25.27 180 bottom
R30  2.2k  [0603]  131.44,24.77 180 bottom
R31  2.2k  [0603]  131.44,23.24 180 bottom
R32  100k  [0603]  117.35,23.37 0 top
R33  100k  [0603]  123.19,15.49 180 top
R34  1k  [0603]  120.52,21.59 270 top
R35  100k  [0603]  127.64,30.35 180 top
R36  4.7k  [0603]  138.94,25.27 180 bottom
R37  2.2k  [0603]  157.35,24.77 180 bottom
R38  2.2k  [0603]  157.35,23.24 180 bottom
R39  100k  [0603]  143.26,23.37 0 top
R40  100k  [0603]  149.1,15.49 180 top
R41  1k  [0603]  146.43,21.59 270 top
R42  100k  [0603]  153.54,30.35 180 top
R43  4.7k  [0603]  9.4,51.18 180 bottom
R44  2.2k  [0603]  27.81,50.67 180 bottom
R45  2.2k  [0603]  27.81,49.15 180 bottom
R46  100k  [0603]  13.72,49.28 0 top
R47  100k  [0603]  19.56,41.4 180 top
R48  1k  [0603]  16.89,47.5 270 top
R49  100k  [0603]  24,56.26 180 top
R50  4.7k  [0603]  35.31,51.18 180 bottom
R51  2.2k  [0603]  53.72,50.67 180 bottom
R52  2.2k  [0603]  53.72,49.15 180 bottom
R53  100k  [0603]  39.62,49.28 0 top
R54  100k  [0603]  45.47,41.4 180 top
R55  1k  [0603]  42.8,47.5 270 top
R56  100k  [0603]  49.91,56.26 180 top
R57  4.7k  [0603]  61.21,51.18 180 bottom
R58  2.2k  [0603]  79.63,50.67 180 bottom
R59  2.2k  [0603]  79.63,49.15 180 bottom
R60  100k  [0603]  65.53,49.28 0 top
R61  100k  [0603]  71.37,41.4 180 top
R62  1k  [0603]  68.71,47.5 270 top
R63  100k  [0603]  75.82,56.26 180 top
R64  4.7k  [0603]  87.12,51.18 180 bottom
R65  2.2k  [0603]  105.54,50.67 180 bottom
R66  2.2k  [0603]  105.54,49.15 180 bottom
R67  100k  [0603]  91.44,49.28 0 top
R68  100k  [0603]  97.28,41.4 180 top
R69  1k  [0603]  94.62,47.5 270 top
R70  100k  [0603]  101.73,56.26 180 top
R71  4.7k  [0603]  113.03,51.18 180 bottom
R72  2.2k  [0603]  131.44,50.67 180 bottom
R73  2.2k  [0603]  131.44,49.15 180 bottom
R74  100k  [0603]  117.35,49.28 0 top
R75  100k  [0603]  123.19,41.4 180 top
R76  1k  [0603]  120.52,47.5 270 top
R77  100k  [0603]  127.64,56.26 180 top
R78  4.7k  [0603]  138.94,51.18 180 bottom
R79  2.2k  [0603]  157.35,50.67 180 bottom
R80  2.2k  [0603]  157.35,49.15 180 bottom
R81  100k  [0603]  143.26,49.28 0 top
R82  100k  [0603]  149.1,41.4 180 top
R83  1k  [0603]  146.43,47.5 270 top
R84  100k  [0603]  153.54,56.26 180 top
R85  4.7k  [0603]  9.4,77.09 180 bottom
R86  2.2k  [0603]  27.81,76.58 180 bottom
R87  2.2k  [0603]  27.81,75.06 180 bottom
R88  100k  [0603]  13.72,75.18 0 top
R89  100k  [0603]  19.56,67.31 180 top
R90  1k  [0603]  16.89,73.41 270 top
R91  100k  [0603]  24,82.17 180 top
R92  4.7k  [0603]  35.31,77.09 180 bottom
R93  2.2k  [0603]  53.72,76.58 180 bottom
R94  2.2k  [0603]  53.72,75.06 180 bottom
R95  100k  [0603]  39.62,75.18 0 top
R96  100k  [0603]  45.47,67.31 180 top
R97  1k  [0603]  42.8,73.41 270 top
R98  100k  [0603]  49.91,82.17 180 top
R99  4.7k  [0603]  61.21,77.09 180 bottom
R100  2.2k  [0603]  79.63,76.58 180 bottom
R101  2.2k  [0603]  79.63,75.06 180 bottom
R102  100k  [0603]  65.53,75.18 0 top
R103  100k  [0603]  71.37,67.31 180 top
R104  1k  [0603]  68.71,73.41 270 top
R105  100k  [0603]  75.82,82.17 180 top
R106  4.7k  [0603]  87.12,77.09 180 bottom
R107  2.2k  [0603]  105.54,76.58 180 bottom
R108  2.2k  [0603]  105.54,75.06 180 bottom
R109  100k  [0603]  91.44,75.18 0 top